# Altium PCB cPCIs_adapter.pcbdoc
Units mm, origin at the board's own origin, x right, y up, seen from the top; angles counter-clockwise.
Board outline 60.31 x 100 mm, 12 copper layers (Top Layer, L2GND, L3, L4PWR, L5, L6PWR, L7GND, L8, L9PWR, L10, L11GND, Bottom Layer), stack 1.695 mm thick; 16 components, 51 nets, 313 pads, 0 vias.
Unrouted connection lines stored in the file: 82.
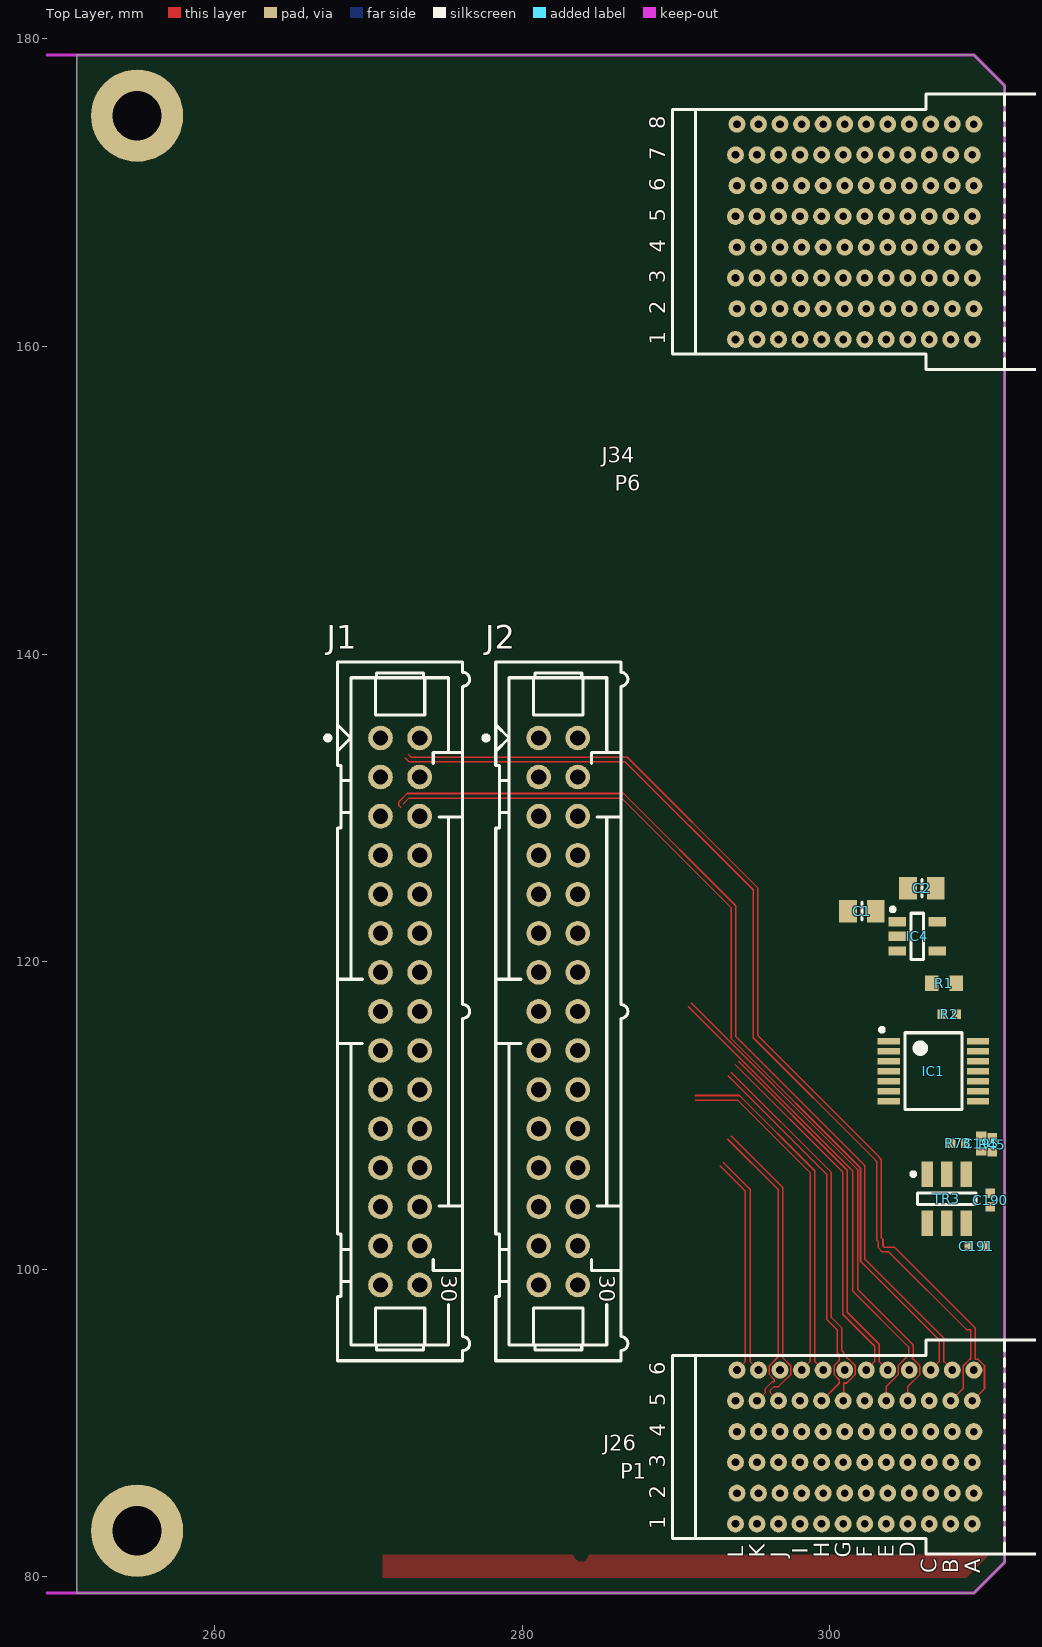
[diagram p0: Top Layer view]
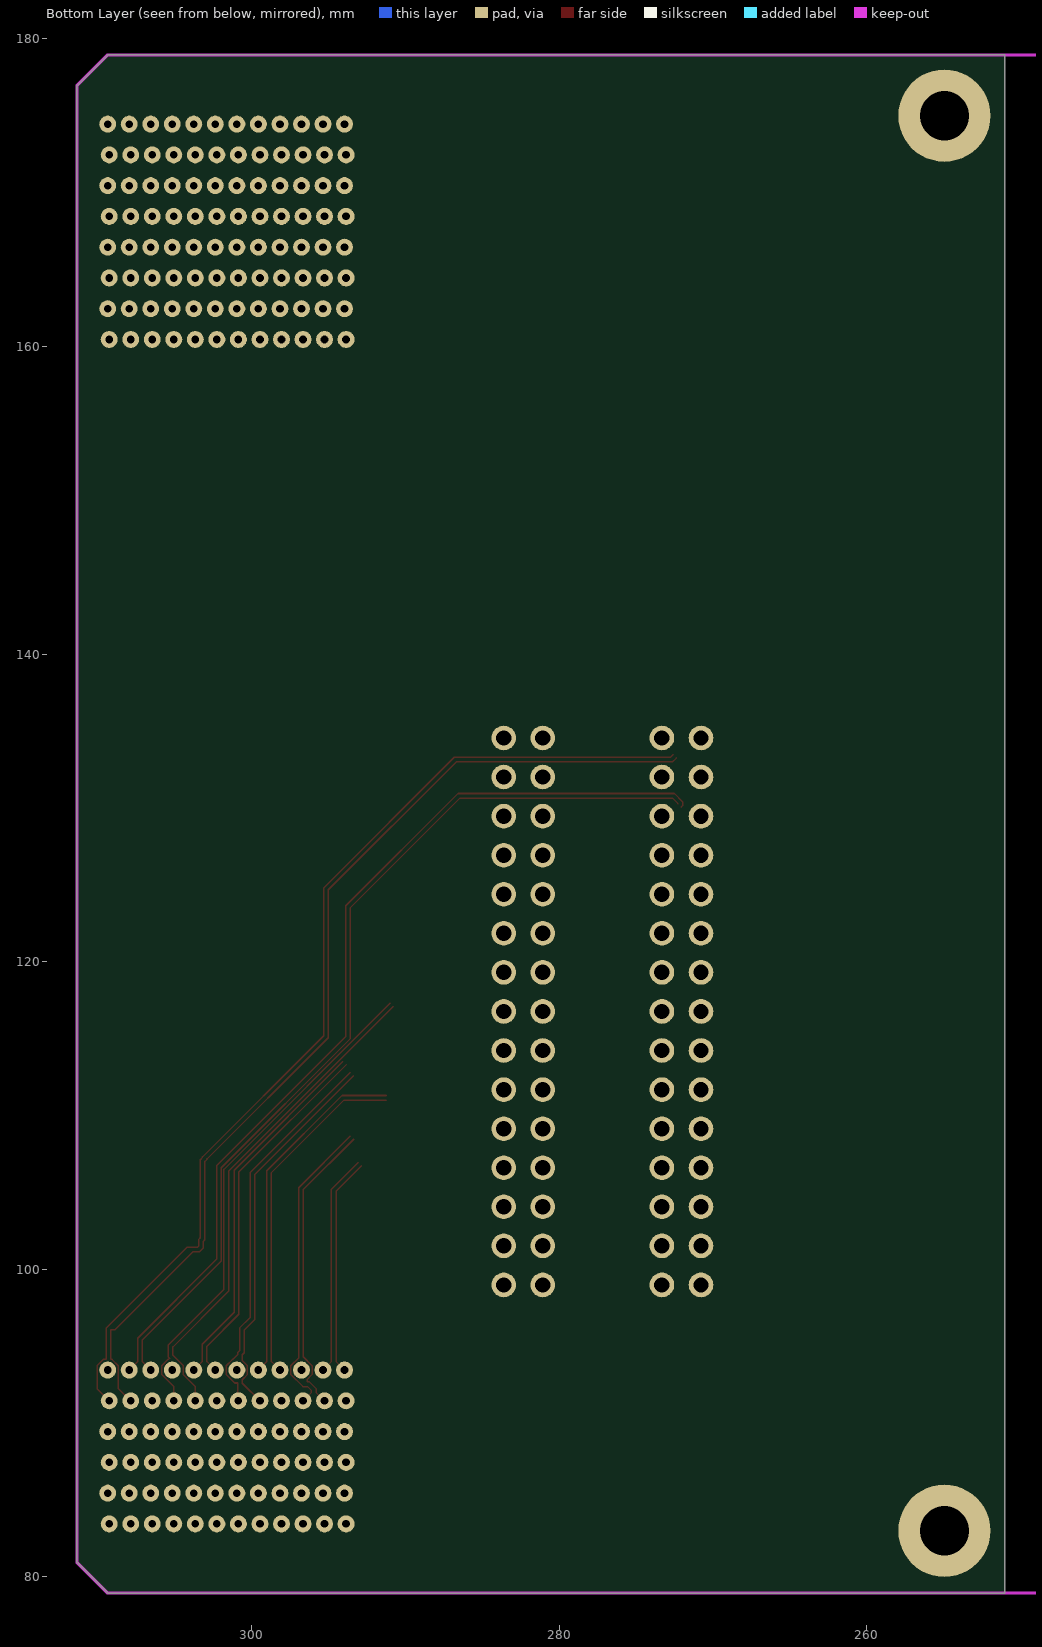
[diagram p1: Bottom Layer view, seen from below]
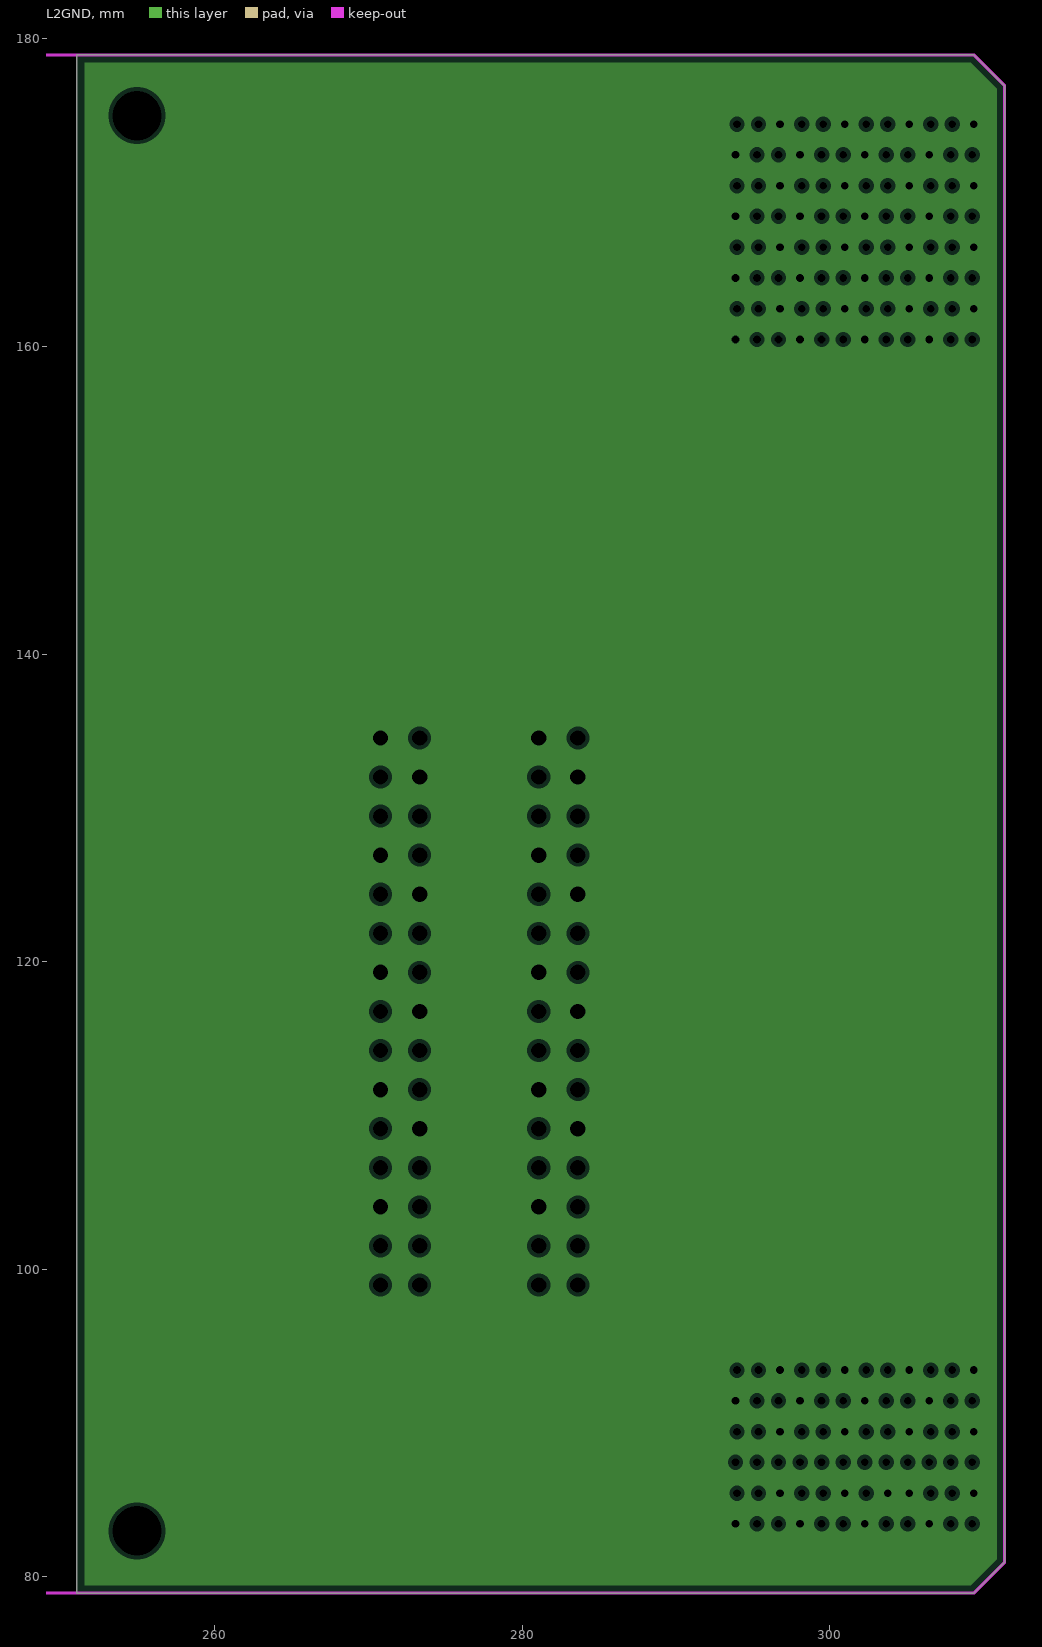
[diagram p2: L2GND, clearances drawn from the general rule]
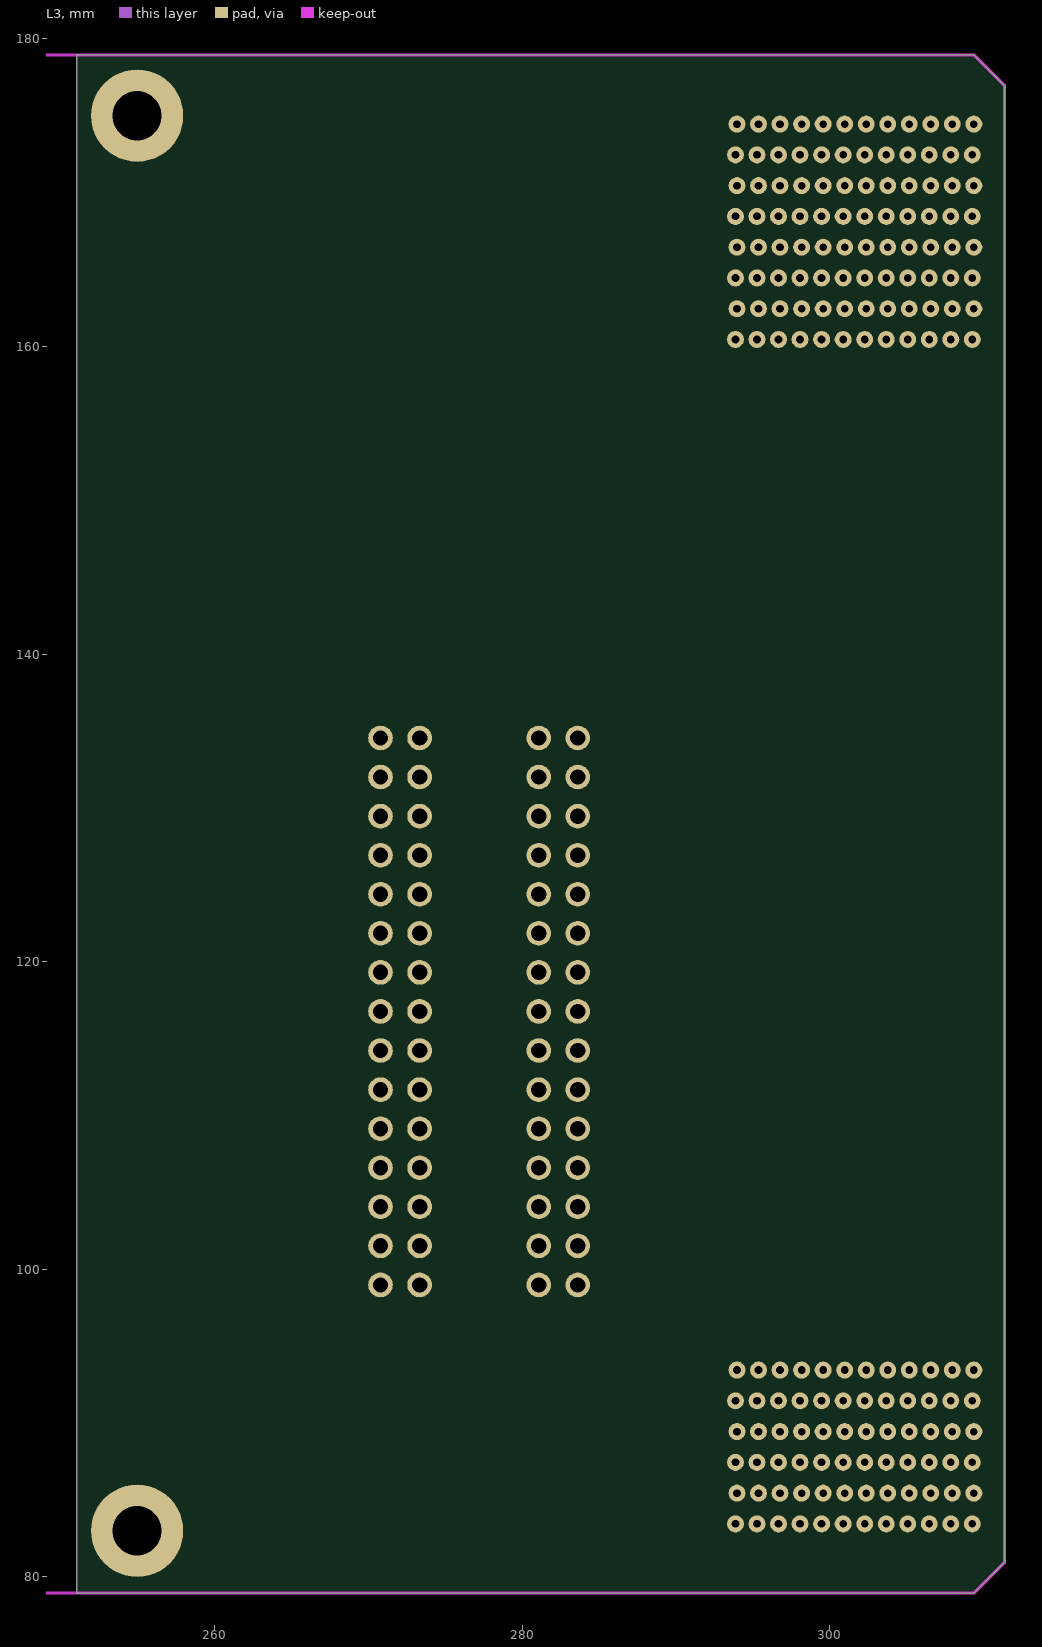
[diagram p3: L3]
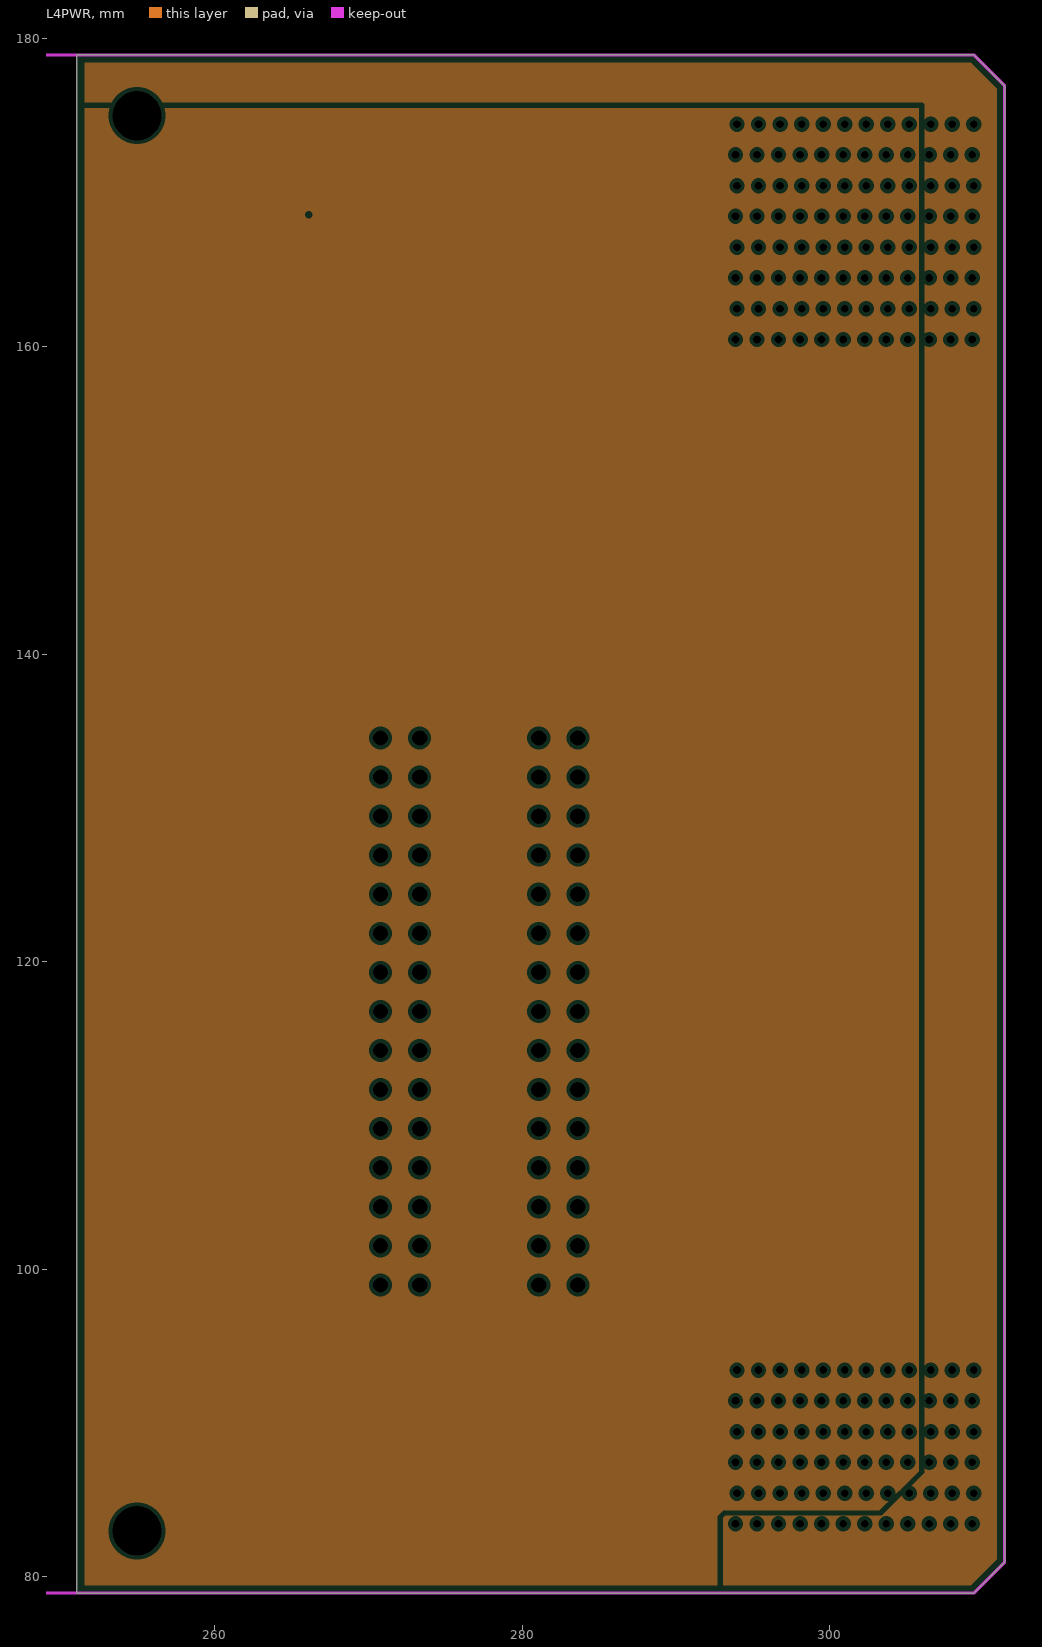
[diagram p4: L4PWR, clearances drawn from the general rule]
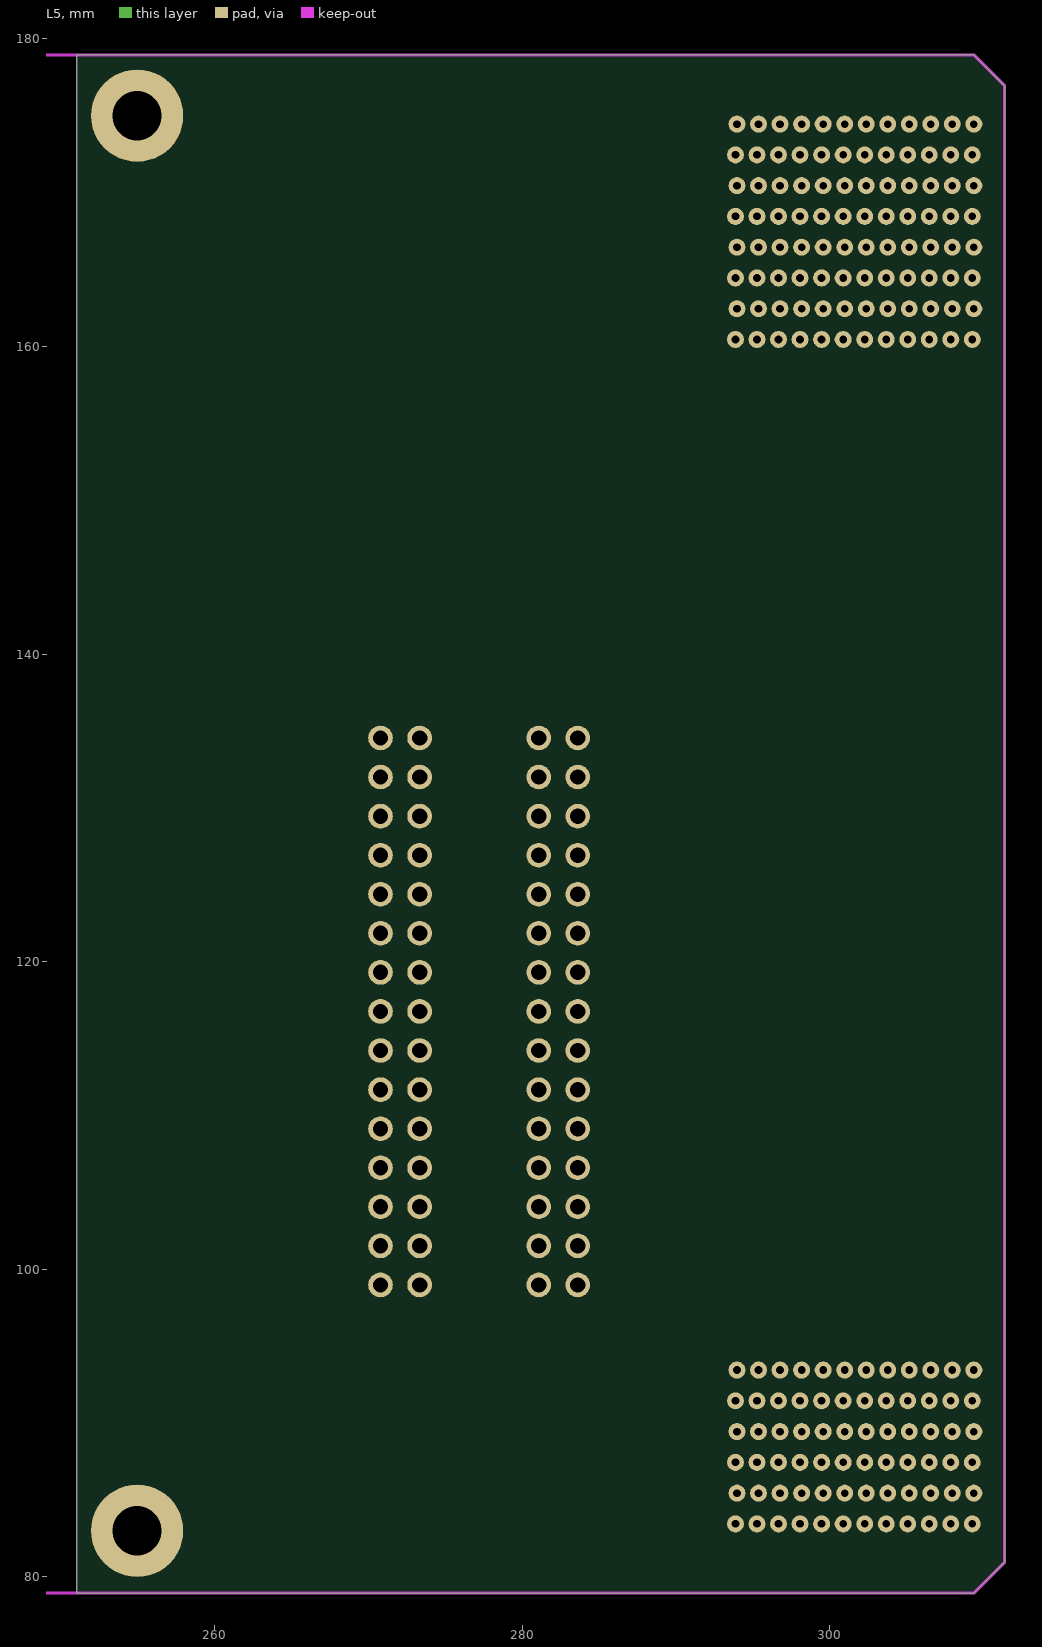
[diagram p5: L5]
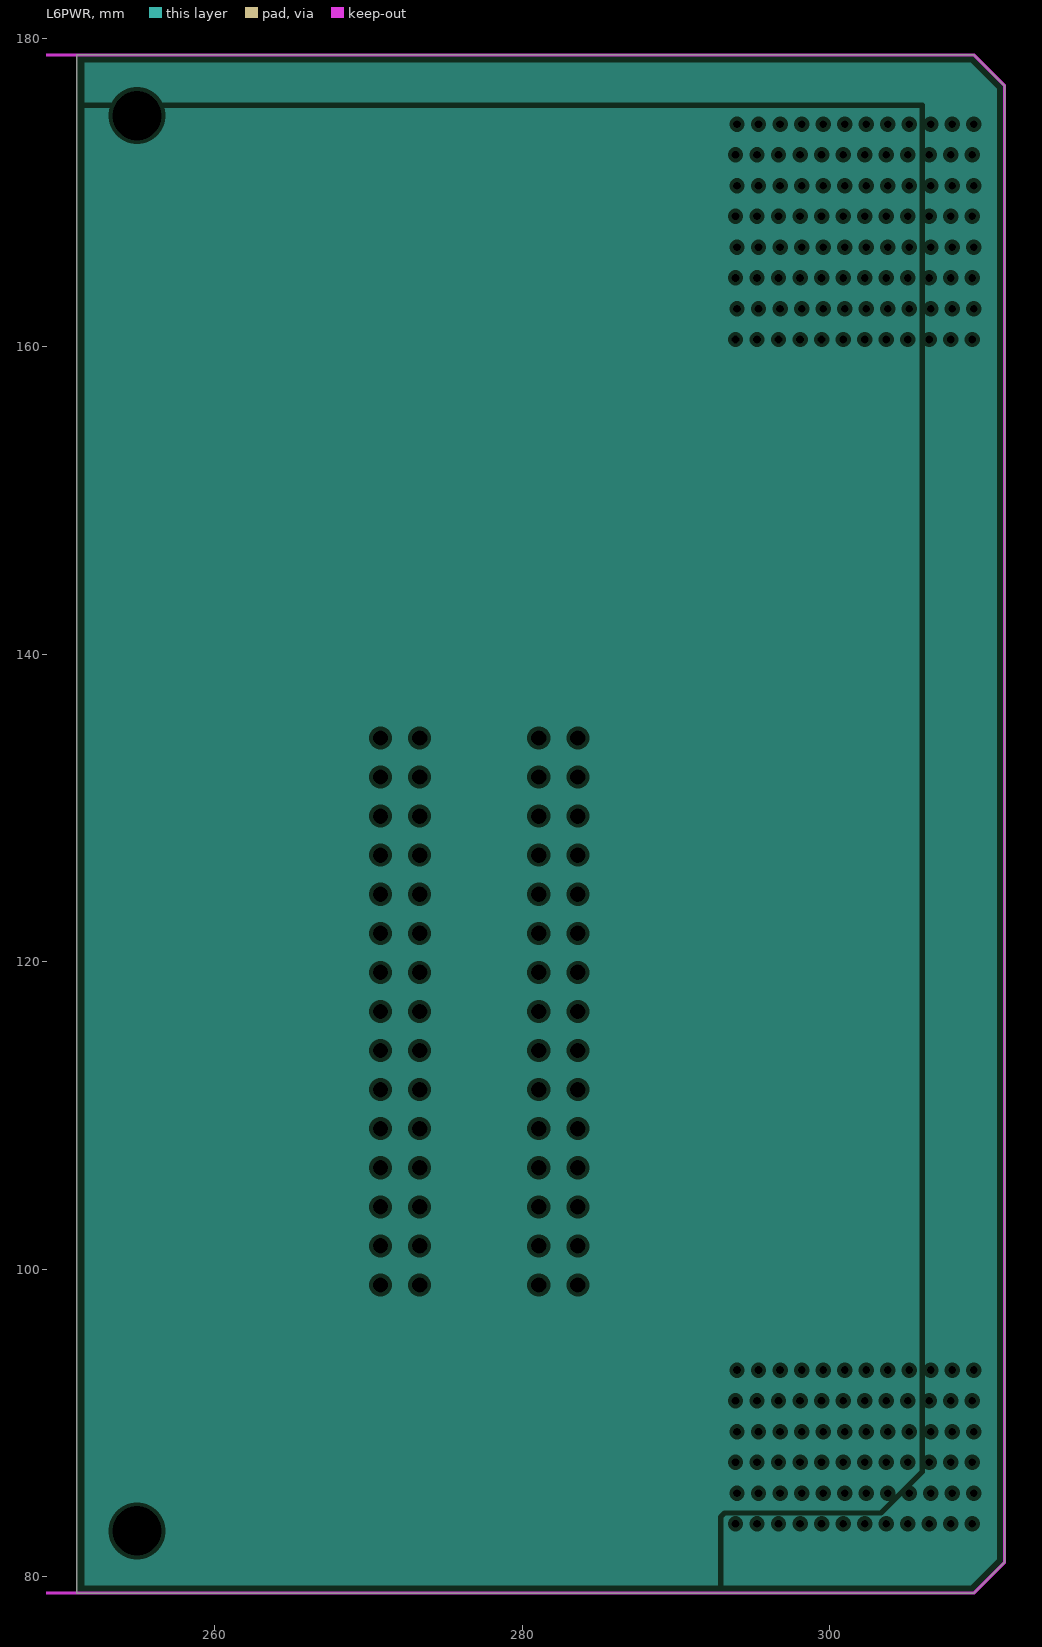
[diagram p6: L6PWR, clearances drawn from the general rule]
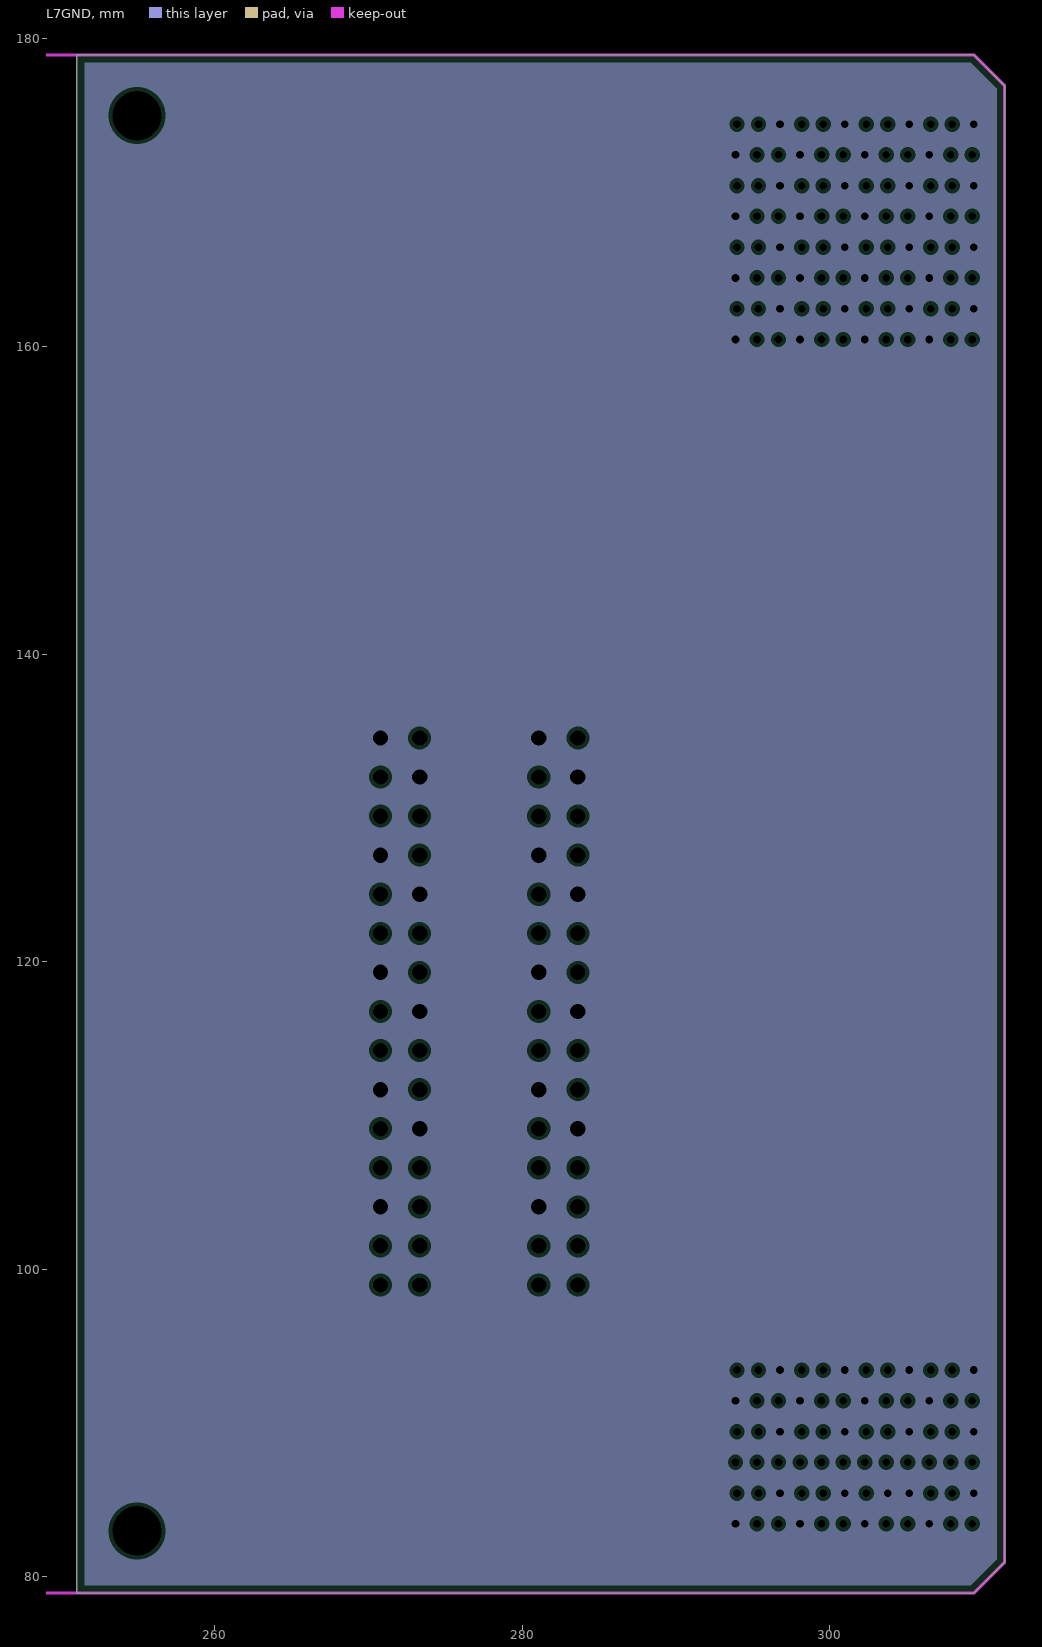
[diagram p7: L7GND, clearances drawn from the general rule]
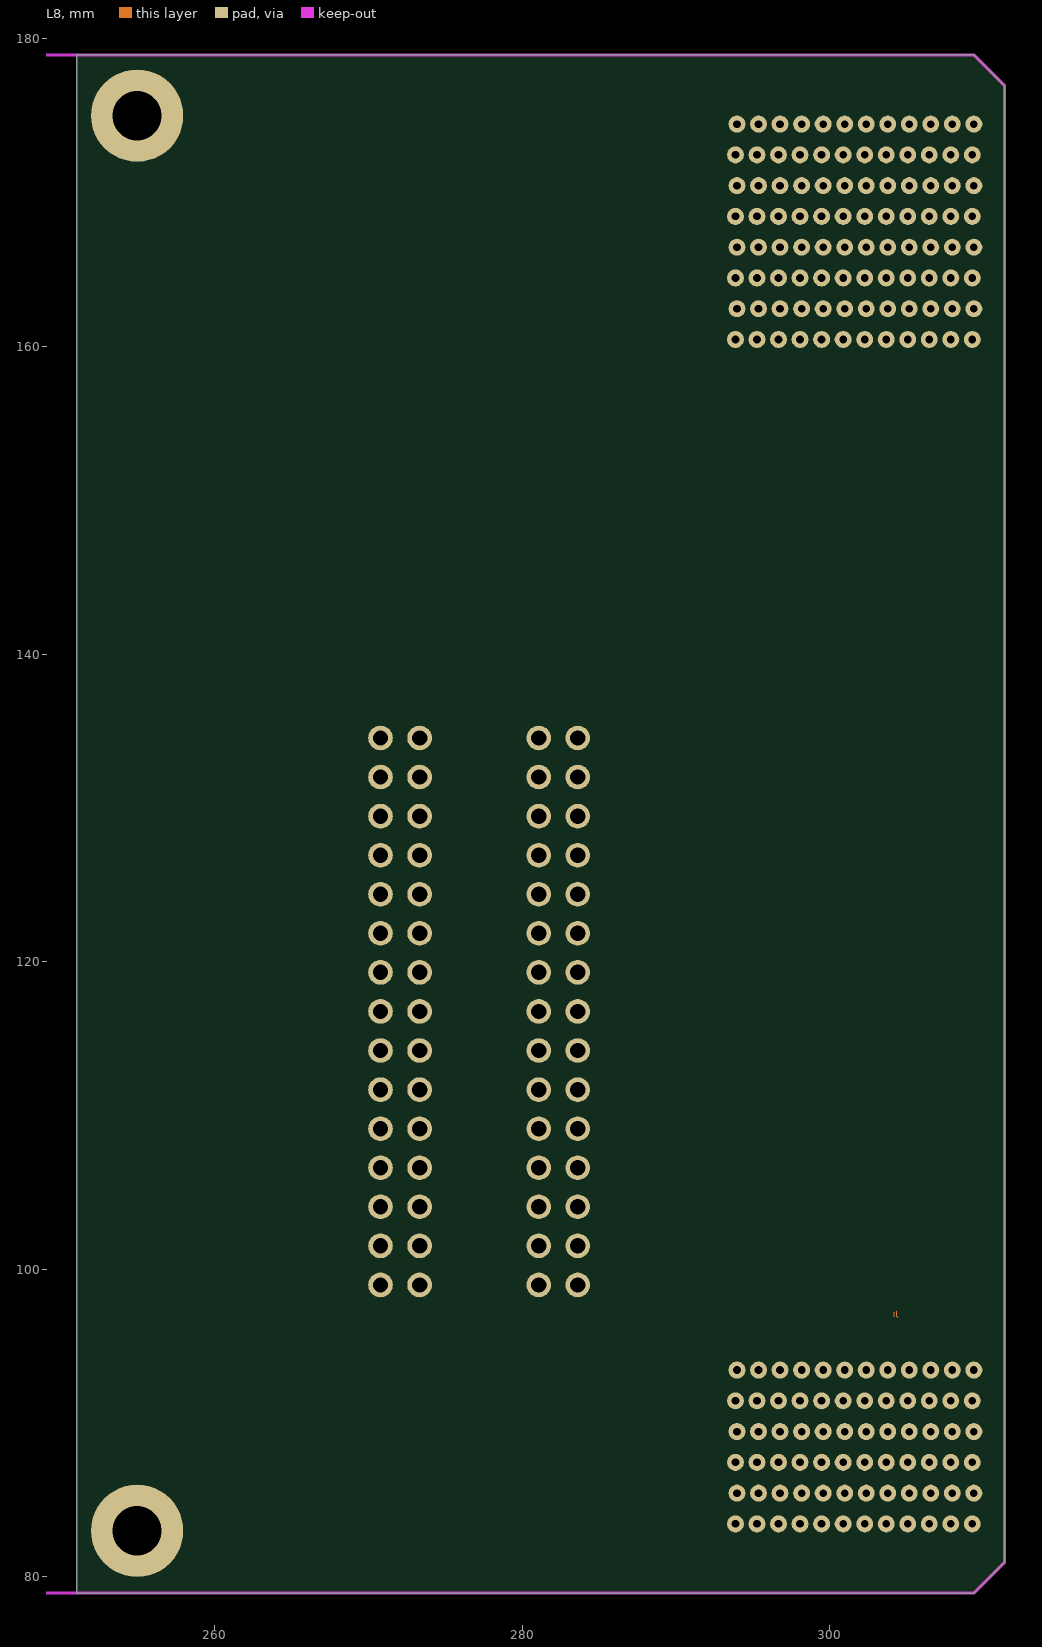
[diagram p8: L8]
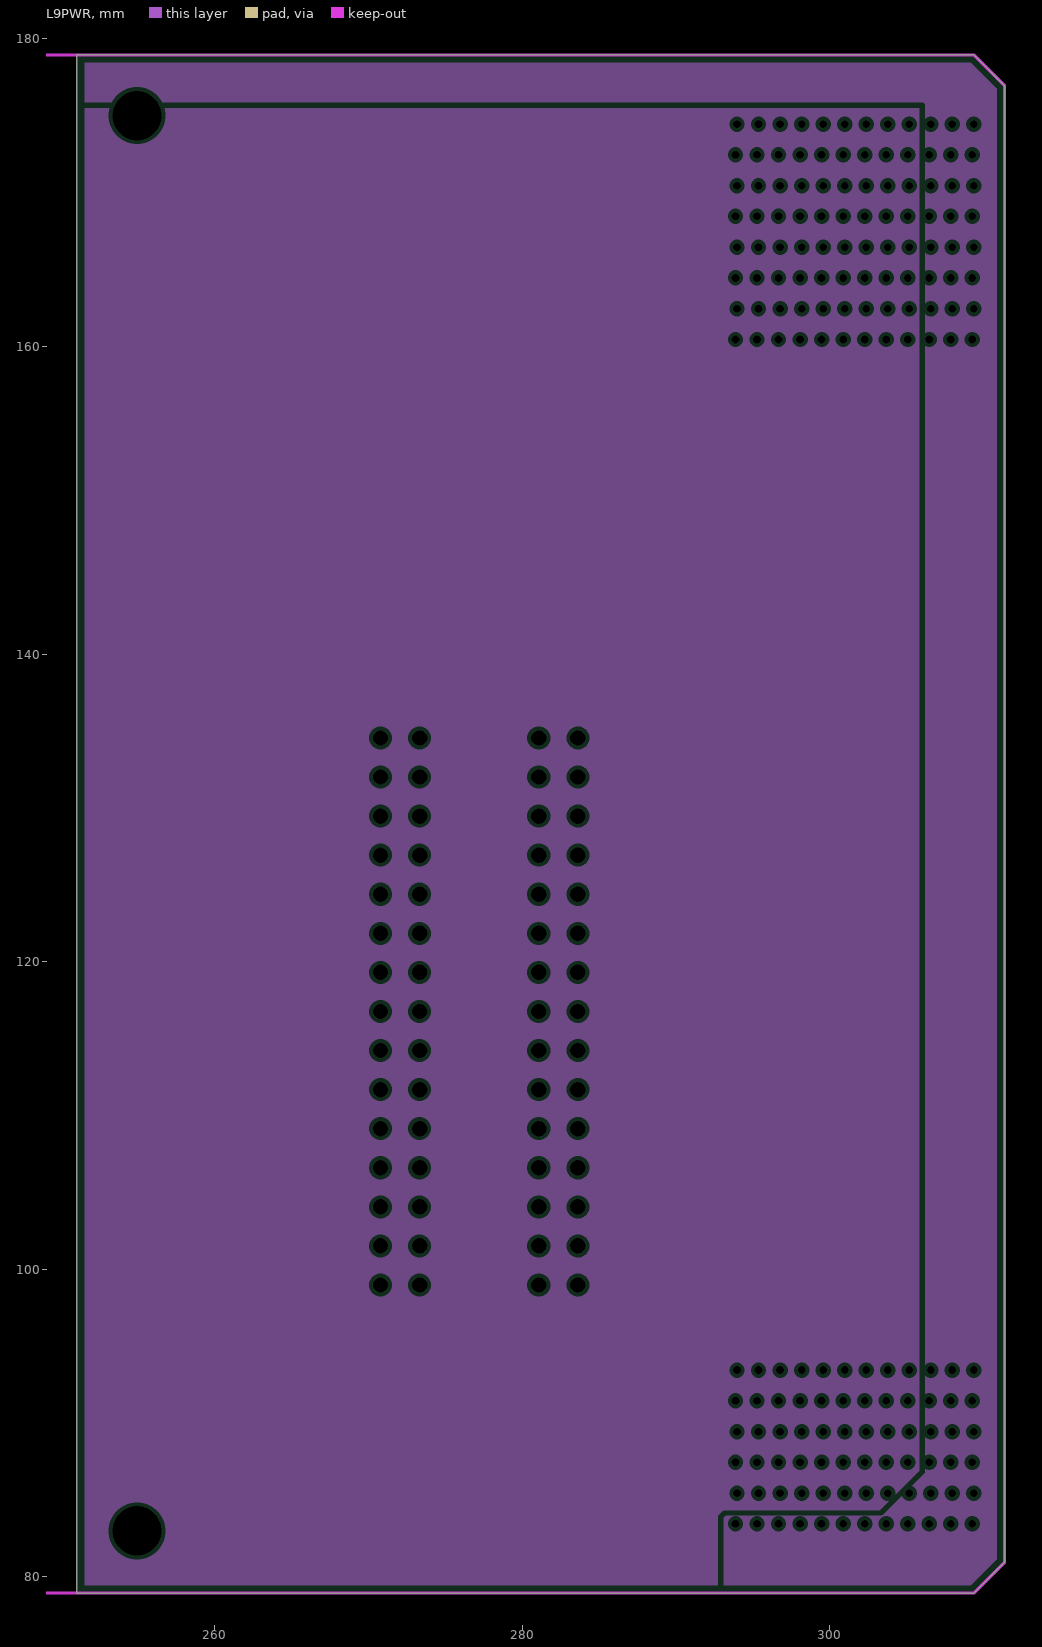
[diagram p9: L9PWR, clearances drawn from the general rule]
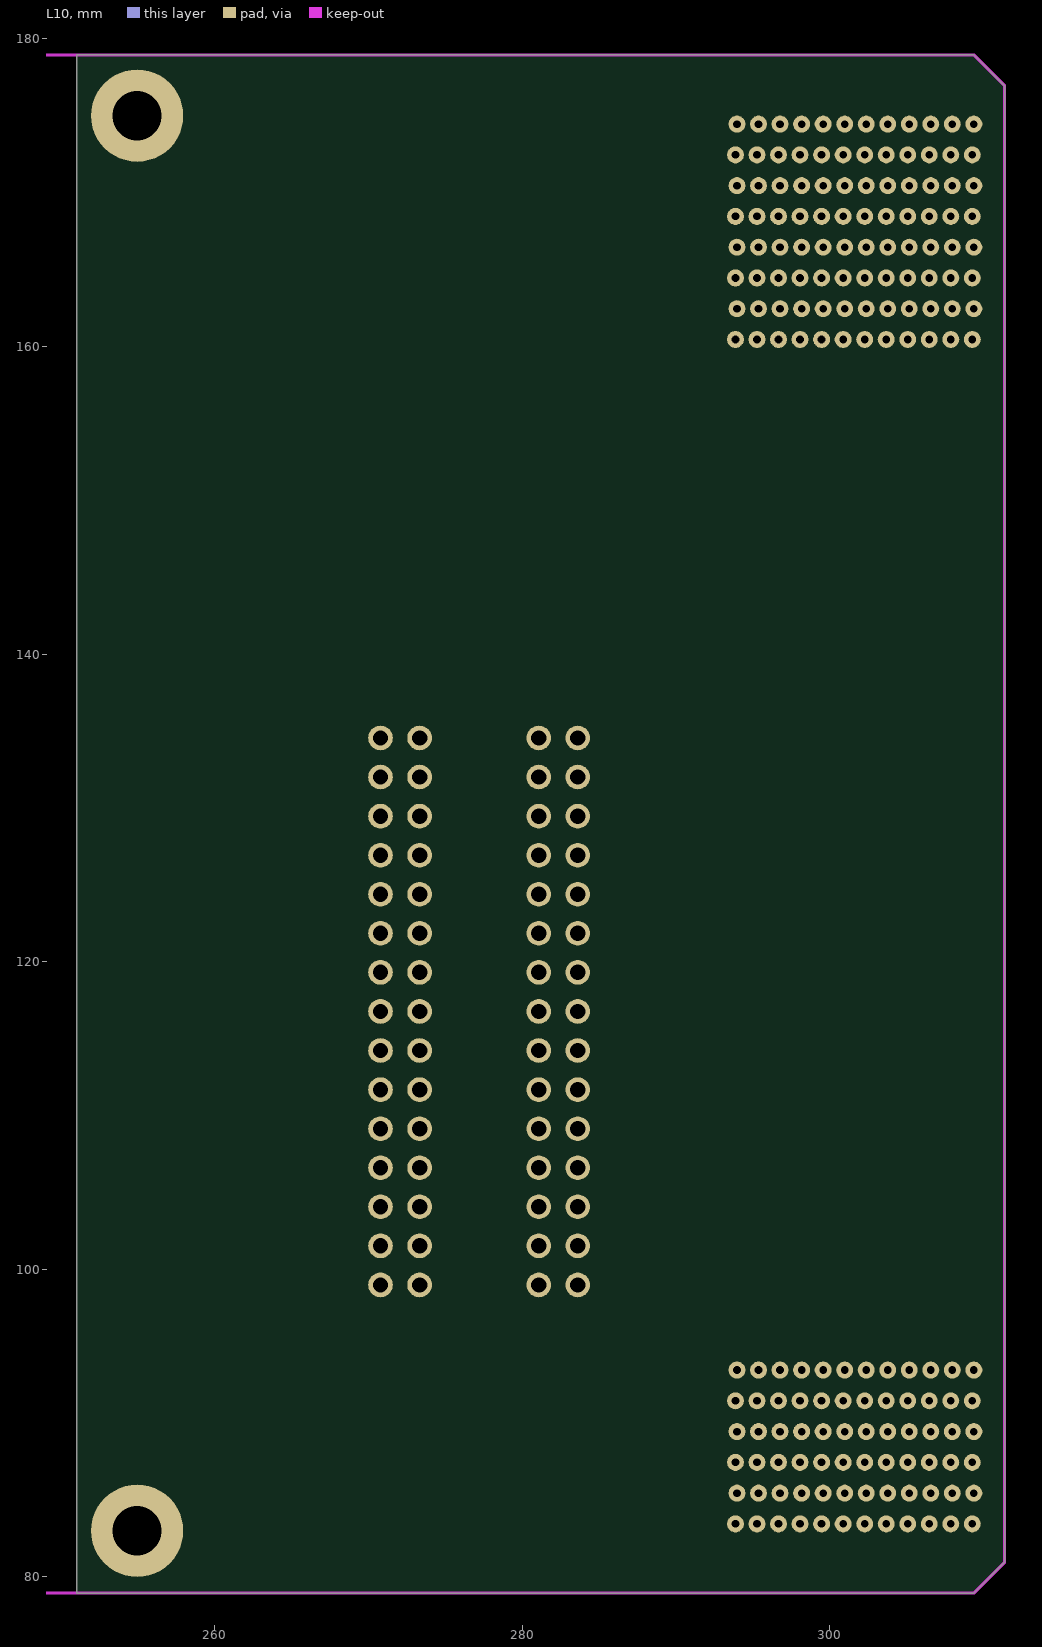
[diagram p10: L10]
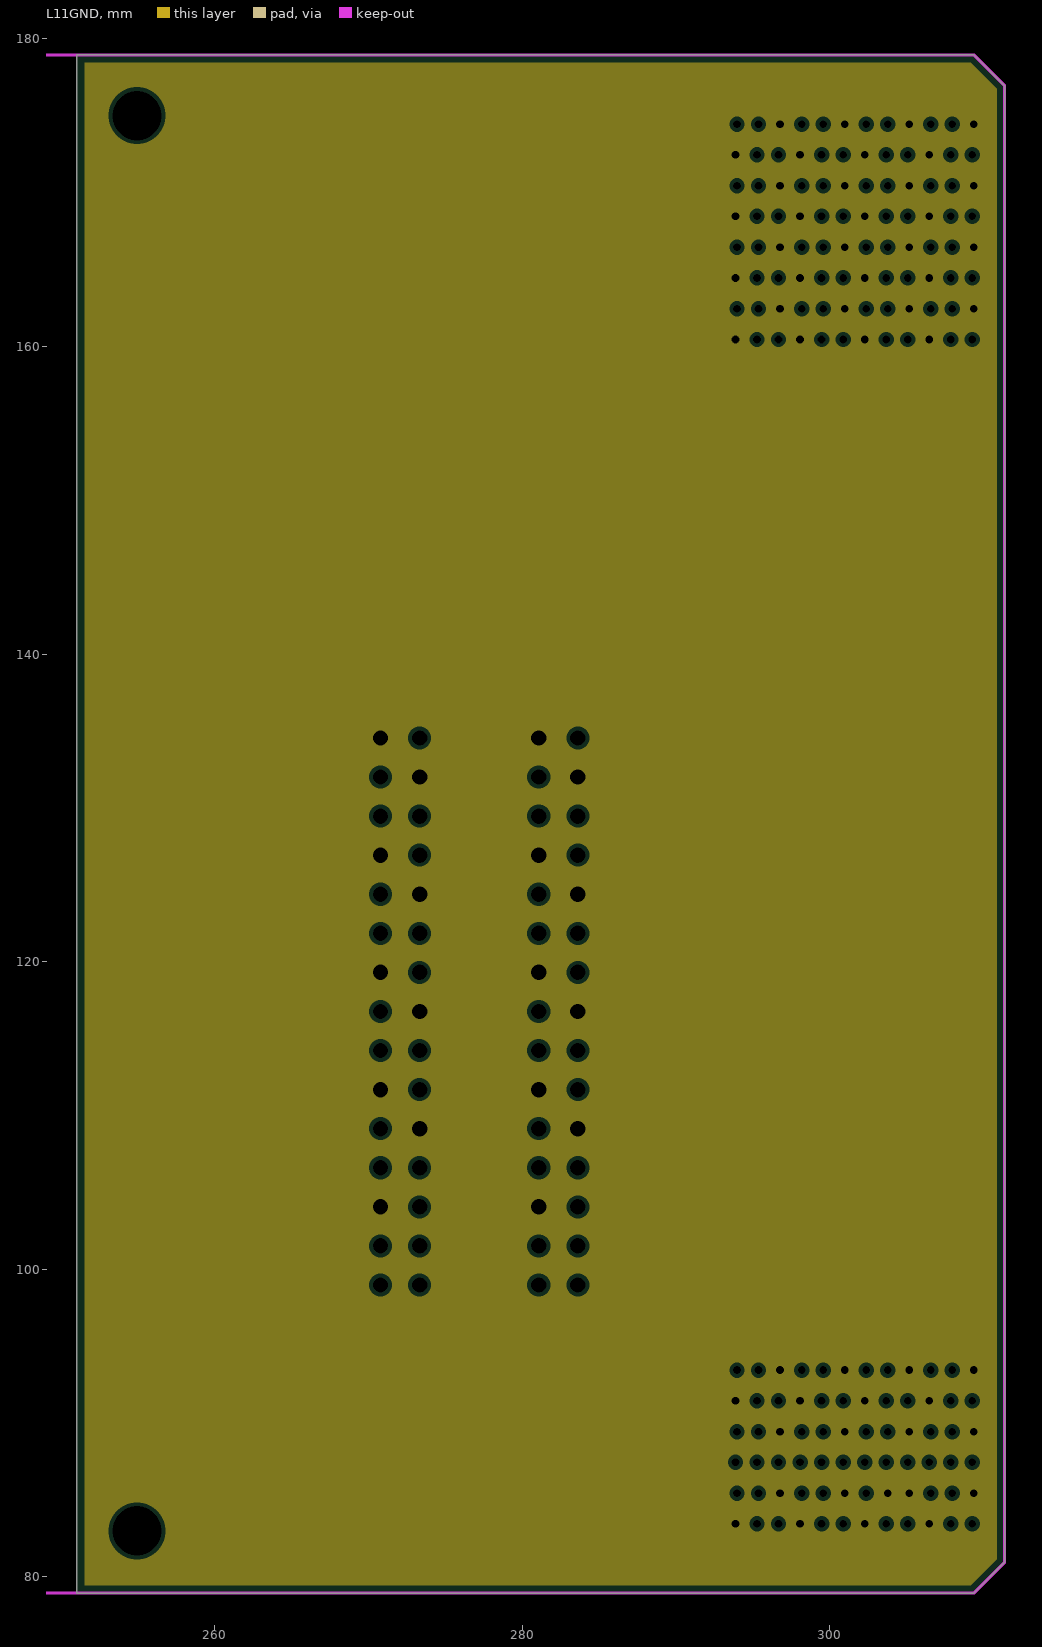
[diagram p11: L11GND, clearances drawn from the general rule]

## Layer stack, top to bottom
Top Solder: solder mask 0.01, Solder Resist, Dk 3.5
Top Layer: signal copper 0.035
Dielectric1: prepreg 0.075, FR-4, Dk 4.6
L2GND: plane copper 0.0175, net GND
Dielectric 2: core 0.15, FR-4, Dk 4.6
L3: signal copper 0.0175
Dielectric3: prepreg 0.15, FR-4, Dk 4.6
L4PWR: plane copper 0.0175
Dielectric 4: core 0.15, FR-4, Dk 4.6
L5: signal copper 0.0175
Dielectric 5: prepreg 0.15, FR-4, Dk 4.6
L6PWR: plane copper 0.0175
Dielectric 6: core 0.1, FR-4, Dk 4.6
L7GND: plane copper 0.0175, net GND
Dielectric 7: prepreg 0.15, FR-4, Dk 4.6
L8: signal copper 0.0175
Dielectric 8: core 0.15, FR-4, Dk 4.6
L9PWR: plane copper 0.0175
Dielectric 9: prepreg 0.15, FR-4, Dk 4.6
L10: signal copper 0.0175
Dielectric 10: core 0.15, FR-4, Dk 4.6
L11GND: plane copper 0.0175, net GND
Dielectric 11: prepreg 0.075, FR-4, Dk 4.6
Bottom Layer: signal copper 0.035
Bottom Solder: solder mask 0.01, Solder Resist, Dk 3.5

## Board outline
251.05,78.95 251.05,178.95 309.364,178.95 311.364,176.95 311.364,80.95 309.364,78.95

## Design rules (kind name [scope] priority, off if disabled: settings)
Clearance Clearance_NT [InComponent('NT*')] p1: gap=0 ignorepadtopadclearanceinfootprint=TRUE
Clearance Clearance_Poly [InPoly] p2: gap=0.18 ignorepadtopadclearanceinfootprint=FALSE
Clearance [All vs not HasFootprint('Net Tie')] p3: gap=0.09 ignorepadtopadclearanceinfootprint=FALSE except(0: Arc-Hole Track-Hole SMDPad-Hole THPad-Hole Via-Hole Fill-Hole Poly-Hole Region-Hole Text-Hole)
ComponentClearance ComponentClearance_pressfit [HasCompParameterValue('PressFit','Yes') vs InComponent('No Component')] p1: gap=5 collisioncheckmode=3 verticalgap=0.254 showdistances=FALSE
ComponentClearance ComponentClearance_NM [InComponentClass('NotMounted')] p2: gap=0 collisioncheckmode=3 verticalgap=0 showdistances=FALSE
ComponentClearance ComponentClearance_Top [not InComponentClass('Overlapping') and InComponentClass('Top Side Components') vs InComponentClass('Top Side Components')] p3: gap=0 collisioncheckmode=3 verticalgap=2540 showdistances=FALSE
ComponentClearance Overlapping [InComponentClass('Overlapping') vs InComponentClass('Overlapping')] p4: gap=0 collisioncheckmode=3 verticalgap=0 showdistances=FALSE
DiffPairsRouting [All] p1: maxlimit=0.2 minlimit=0.1 mostfreqgap=0.1 toplayer_mingap=0.2 toplayer_prefgap=0.2 toplayer_minwidth=0.1 toplayer_maxwidth=0.1 toplayer_prefwidth=0.1 midlayer1_maxgap=0.1 midlayer1_minwidth=0.08 midlayer1_maxwidth=0.08 midlayer1_prefwidth=0.08 midlayer2_maxgap=0.1 midlayer2_minwidth=0.08 midlayer2_maxwidth=0.08 midlayer2_prefwidth=0.08 midlayer3_maxgap=0.1 midlayer3_minwidth=0.08 midlayer3_maxwidth=0.08 midlayer3_prefwidth=0.08 midlayer4_maxgap=0.1 midlayer4_minwidth=0.08 midlayer4_maxwidth=0.08 midlayer4_prefwidth=0.08 bottomlayer_mingap=0.2 bottomlayer_prefgap=0.2 bottomlayer_minwidth=0.1 bottomlayer_maxwidth=0.1 bottomlayer_prefwidth=0.1 maxuncoupledlength=50
FabricationTestPointUsage TestPointUsage [All] p1: valid=0 allowmultiple=FALSE
FabricationTestpoint Testpoint [All] p1: side=3 testpointundercomponent=TRUE minsize=1.016 maxsize=2.54 preferedsize=1.524 minholesize=0 maxholesize=1.016 preferedholesize=0.813 testpointgrid=0.025 allowsidetop=TRUE allowsidebottom=TRUE usegrid=TRUE gridtolerance=0
Height [All] p1: minheight=0 maxheight=25 prefheight=10
HoleSize [All] p1: absolutevalues=TRUE maxlimit=5 minlimit=0.2 maxpercent=80.000 minpercent=20.000
HoleToHoleClearance [All] p1: gap=0.2 allowstackedmicrovias=TRUE
Length "Length CPCIs2a + XS" [InNetClass('CPCIs2a') or InxSignalClass('CPCIs2 XS')] p1: maxlimit=126 minlimit=121
Length "Length CPCIs5a + XS" [InNetClass('CPCIs5a')    or InxSignalClass('CPCIs5 XS')] p2: maxlimit=155.1 minlimit=151
MatchedLengths DiffPair_gbtclkm2c_MatchedLengths [InDifferentialPair ('FMCGBTCLKM2C_C1') Or InDifferentialPair ('FMCGBTCLKM2C_C0')] p1: tolerance=5 checknetsindiffpair=FALSE checkdiffpairvsdiffpair=TRUE checkxsignals=TRUE checkothers=TRUE
MatchedLengths DiffPair_gbtxClockDes_MatchedLengths [InDifferentialPair ('GBTXCLOCKDES_N0') Or InDifferentialPair ('GBTXCLOCKDES_P0') Or InDifferentialPair ('GBTXCLOCKDES_N1') Or InDifferentialPair ('GBTXCLOCKDES_P1')Or InDifferentialPair ('GBTXCLOCKDES_N2') Or InDifferentialPair ('GBTXCLOCKDES_P2')Or InDifferentialPair ('GBTXCLOCKDES_N3') Or InDifferentialPair ('GBTXCLOCKDES_P3') Or InDifferentialPair ('GBTXCLOCKDES_N4') Or InDifferentialPair ('GBTXCLOCKDES_P4')] p2: tolerance=5 checknetsindiffpair=FALSE checkdiffpairvsdiffpair=TRUE checkxsignals=TRUE checkothers=TRUE
MatchedLengths DiffPair_Scout_ScclkMatchedLengths [InDifferentialPair ('GBTXELINKSSCCLK') Or InDifferentialPair ('GBTXELINKSSCOUT')] p3: tolerance=5 checknetsindiffpair=FALSE checkdiffpairvsdiffpair=TRUE checkxsignals=TRUE checkothers=TRUE
MinimumAnnularRing MinimumAnnularRing_Via [IsVia] p1: minimumring=0.12
MinimumAnnularRing [All] p2: minimumring=0.198
MinimumSolderMaskSliver [IsThruPin vs IsThruPin] p1: minsoldermaskwidth=0
NetAntennae [All] p1 off: netantennaetolerance=0
PermittedLayers [All] p1: toplayerpermitted=TRUE bottomlayerpermitted=FALSE
PlaneClearance [All] p1: clearance=0.25
PlaneConnect PlaneConnect_ft_pcbm [InPadClass('ft_pcbm')] p1: planeconnectstyle=Relief reliefexpansion=0.25 reliefentries=4 reliefconductorwidth=0.2 reliefairgap=0.2
PlaneConnect PlaneConnect_Vias [IsVia or InPadClass('Direct')] p2: planeconnectstyle=Direct reliefexpansion=0.508 reliefentries=4 reliefconductorwidth=0.254 reliefairgap=0.254
PlaneConnect "PlaneConnect_0 > 0.5" [AsMM(HoleDiameter)<0.5] p3: planeconnectstyle=Relief reliefexpansion=0.3 reliefentries=4 reliefconductorwidth=0.2 reliefairgap=0.2
PlaneConnect "PlaneConnect_0.5 > 1" [(AsMM(HoleDiameter)>=0.5) and (AsMM(HoleDiameter)<1)] p4: planeconnectstyle=Relief reliefexpansion=0.3 reliefentries=4 reliefconductorwidth=0.25 reliefairgap=0.2
PlaneConnect "PlaneConnect_1 > 1.5" [(AsMM(HoleDiameter)>=1) and (AsMM(HoleDiameter)<1.5)] p5: planeconnectstyle=Relief reliefexpansion=0.3 reliefentries=4 reliefconductorwidth=0.3 reliefairgap=0.2
PlaneConnect "PlaneConnect_1.5 > 2" [(AsMM(HoleDiameter)>=1.5) and (AsMM(HoleDiameter)<2)] p6: planeconnectstyle=Relief reliefexpansion=0.3 reliefentries=4 reliefconductorwidth=0.4 reliefairgap=0.2
PlaneConnect [All] p7: planeconnectstyle=Relief reliefexpansion=0.3 reliefentries=4 reliefconductorwidth=0.5 reliefairgap=0.2
PolygonConnect PolygonConnect_Vias [IsVia or InPadClass('Direct') or InNetClass('ESD_STRIP')] p1: connectstyle=Direct reliefconductorwidth=0.254 reliefentries=4 polygonreliefangle="90 Angle" airgapwidth=0.254
PolygonConnect "PolygonConnect_0 > 0.5" [AsMM(HoleDiameter)<0.5] p2: connectstyle=Relief reliefconductorwidth=0.2 reliefentries=4 polygonreliefangle="90 Angle" airgapwidth=0.2
PolygonConnect "PolygonConnect_0.5 > 1" [(AsMM(HoleDiameter)>=0.5) and (AsMM(HoleDiameter)<1)] p3: connectstyle=Relief reliefconductorwidth=0.25 reliefentries=4 polygonreliefangle="90 Angle" airgapwidth=0.2
PolygonConnect "PolygonConnect_1 > 1.5" [(AsMM(HoleDiameter)>=1) and (AsMM(HoleDiameter)<1.5)] p4: connectstyle=Relief reliefconductorwidth=0.3 reliefentries=4 polygonreliefangle="90 Angle" airgapwidth=0.2
PolygonConnect "PolygonConnect_1.5 > 2" [(AsMM(HoleDiameter)>=1.5) and (AsMM(HoleDiameter)<2)] p5: connectstyle=Relief reliefconductorwidth=0.4 reliefentries=4 polygonreliefangle="90 Angle" airgapwidth=0.2
PolygonConnect [All] p6: connectstyle=Relief reliefconductorwidth=0.5 reliefentries=4 polygonreliefangle="90 Angle" airgapwidth=0.2
RoomDefinition Cpcis_connectors_P1_P6 [InComponentClass('Cpcis_connectors_P1_P6')] p1: confinementstyle=ConfineIn formatcopy=TRUE lockcomponents=FALSE outline 149.657,89.687 164.668,89.687 164.668,149.682 149.657,149.682
RoutingVias [All] p1: holewidth=0.3 width=0.65 viastyle="Through Hole" minholewidth=0.2 minwidth=0.45 maxholewidth=0.5 maxwidth=1
ShortCircuit ShortCircuit_NT [InComponent('J34') or  InComponent('J31') or InComponent('J30') or InComponent('J29') or InComponent('J33') or InComponent('J26') vs InComponent('NT*')] p1: allowed=TRUE
ShortCircuit [All] p2: allowed=FALSE
SilkToSilkClearance [All] p1: silktosilkclearance=0.05
SilkToSolderMaskClearance [IsPad] p1: minsilkscreentomaskgap=0.08 clearancetoexposedcopper=TRUE
SolderMaskExpansion [All] p1: expansion=0
ViasUnderSMD ViasUnderSMD_1 [HasFootprint ('CAPC0603X33N')   or HasFootprint ('RESC1005X40N')  or HasFootprint('CAPC1608X87N')   or HasFootprint('CAPC1005X55N')   or  HasFootprint('Net Tie')] p1: allowed=TRUE
ViasUnderSMD [not InComponentClass('Overlapping')] p2: allowed=FALSE
Width [All] p1: maxlimit=2.54 minlimit=0.08 preferedwidth=0.08 toplayer_minwidth=0.1 toplayer_prefwidth=0.1 bottomlayer_minwidth=0.1 bottomlayer_prefwidth=0.1 minimp=50.000000 maximp=50.000000 favimp=50.000000
16 further rules are at their usual default settings.

## Classes and differential pairs
differential pair LVDS15: +LVDS15_P -LVDS15_N
differential pair LVDS14: +LVDS14_P -LVDS14_N
differential pair LVDS13: +LVDS13_P -LVDS13_N
differential pair LVDS12: +LVDS12_P -LVDS12_N
differential pair LVDS11: +LVDS11_P -LVDS11_N
differential pair LVDS10: +LVDS10_P -LVDS10_N
differential pair LVDS9: +LVDS9_P -LVDS9_N
differential pair LVDS8: +LVDS8_P -LVDS8_N
differential pair LVDS7: +LVDS7_P -LVDS7_N
differential pair LVDS6: +LVDS6_P -LVDS6_N
differential pair LVDS5: +LVDS5_P -LVDS5_N
differential pair LVDS4: +LVDS4_P -LVDS4_N
differential pair LVDS3: +LVDS3_P -LVDS3_N
differential pair LVDS2: +LVDS2_P -LVDS2_N
differential pair LVDS1: +LVDS1_P -LVDS1_N
differential pair LVDS0: +LVDS0_P -LVDS0_N

## Components (designator, comment, footprint, x,y, rotation, side; value= is the part's Value field where it differs from the comment)
C1 "1uF" CAPC2012X140N 302.084,123.288 r0 top
C2 "1uF" CAPC2012X140N 305.984,124.77 r0 top
C190 "100nF" CAPC1005X55N 310.42,104.505 r90 top
C191 "0.5pF" CAPC1005X50N 309.524,101.516 r180 top
C195 "0.5pF" CAPC1005X50N 309.845,108.168 r90 top
IC1 "74HC4066PW" SOP65P640X110-14N 306.73,112.878 r0 top
IC4 "NCP703SN33T1G" SOT95P275X110-5N 305.689,121.649 r0 top
J1 "=Familly" 3M_N2530-6002RB 272.059,116.764 r270 top
J2 "=Familly" 3M_N2530-6002RB 282.346,116.764 r270 top
J26 "P1" AMPHENOL_10052825-101LF 301.614,88.45 r90 top
J34 "P6" AMPHENOL_10052838-101LF 301.614,167.45 r90 top
R1 "220" RESC1608X55N 307.42,118.59 r0 top
R2 "0" RESC1005X40N 307.774,116.59 r0 top
R45 "0" RESC1005X40N 310.566,108.09 r90 top
R73 "0" RESC1005X40N 308.356,108.208 r180 top
TR3 "1:2" XFMR_MINI-CIRCUITS_DB1627 307.594,104.59 r0 top

## Footprints (in the part's own frame and the unit in brackets; to place one, negate y for a bottom-side part, rotate by r counter-clockwise, add the part's x,y. Pads: shape width x height; smd on the part's side, far side on the other; paste and mask are expansions set on the pad)
3M_N2530-6002RB [mm] "30 Contacts - Straight .100\" x .100\" Low Profile Four-Wall Header"
  round 1.6 hole 1: 1(-17.78,-1.27) 2(-17.78,1.27) 3(-15.24,-1.27) 4(-15.24,1.27) 5(-12.7,-1.27) 6(-12.7,1.27) 7(-10.16,-1.27) 8(-10.16,1.27) 9(-7.62,-1.27) 10(-7.62,1.27) 11(-5.08,-1.27) 12(-5.08,1.27) 13(-2.54,-1.27) 14(-2.54,1.27) 15(0,-1.27) 16(0,1.27) 17(2.54,-1.27) 18(2.54,1.27) 19(5.08,-1.27) 20(5.08,1.27) 21(7.62,-1.27) 22(7.62,1.27) 23(10.16,-1.27) 24(10.16,1.27) 25(12.7,-1.27) 26(12.7,1.27) 27(15.24,-1.27) 28(15.24,1.27) 29(17.78,-1.27) 30(17.78,1.27)
  silkscreen extent -22.71,-4.85 22.71,4.52, body extent -22.71,-4.11 22.71,4.52, height 9.91
AMPHENOL_10052825-101LF [mm] "72 Contacts, 2mm Pitch, 6 Columns, 4 Pairs per Column, 4 Walls, Right Angle Header"
  round 1.1 hole 0.5: A1(-5,-7.65) A2(-3,-7.75) A3(-1,-7.65) A4(1,-7.75) A5(3,-7.65) A6(5,-7.75) B1(-5,-6.25) B2(-3,-6.35) B3(-1,-6.25) B4(1,-6.35) B5(3,-6.25) B6(5,-6.35) C1(-5,-4.85) C2(-3,-4.95) C3(-1,-4.85) C4(1,-4.95) C5(3,-4.85) C6(5,-4.95) D1(-5,-3.45) D2(-3,-3.55) D3(-1,-3.45) D4(1,-3.55) D5(3,-3.45) D6(5,-3.55) E1(-5,-2.05) E2(-3,-2.15) E3(-1,-2.05) E4(1,-2.15) E5(3,-2.05) E6(5,-2.15) F1(-5,-0.65) F2(-3,-0.75) F3(-1,-0.65) F4(1,-0.75) F5(3,-0.65) F6(5,-0.75) G1(-5,0.75) G2(-3,0.65) G3(-1,0.75) G4(1,0.65) G5(3,0.75) G6(5,0.65) H1(-5,2.15) H2(-3,2.05) H3(-1,2.15) H4(1,2.05) H5(3,2.15) H6(5,2.05) I1(-5,3.55) I2(-3,3.45) I3(-1,3.55) I4(1,3.45) I5(3,3.55) I6(5,3.45) J1(-5,4.95) J2(-3,4.85) J3(-1,4.95) J4(1,4.85) J5(3,4.95) J6(5,4.85) K1(-5,6.35) K2(-3,6.25) K3(-1,6.35) K4(1,6.25) K5(3,6.35) K6(5,6.25) L1(-5,7.75) L2(-3,7.65) L3(-1,7.75) L4(1,7.65) L5(3,7.75) L6(5,7.65)
  silkscreen extent -6.95,-21.95 6.95,11.85, body extent -6.95,-21.95 6.95,11.85, height 15.25
AMPHENOL_10052838-101LF [mm] "96 Contacts, 2mm Pitch, 8 Columns, 4 Pairs per Column, 4 Walls, Right Angle Header"
  round 1.1 hole 0.5: A1(-7,-7.65) A2(-5,-7.75) A3(-3,-7.65) A4(-1,-7.75) A5(1,-7.65) A6(3,-7.75) A7(5,-7.65) A8(7,-7.75) B1(-7,-6.25) B2(-5,-6.35) B3(-3,-6.25) B4(-1,-6.35) B5(1,-6.25) B6(3,-6.35) B7(5,-6.25) B8(7,-6.35) C1(-7,-4.85) C2(-5,-4.95) C3(-3,-4.85) C4(-1,-4.95) C5(1,-4.85) C6(3,-4.95) C7(5,-4.85) C8(7,-4.95) D1(-7,-3.45) D2(-5,-3.55) D3(-3,-3.45) D4(-1,-3.55) D5(1,-3.45) D6(3,-3.55) D7(5,-3.45) D8(7,-3.55) E1(-7,-2.05) E2(-5,-2.15) E3(-3,-2.05) E4(-1,-2.15) E5(1,-2.05) E6(3,-2.15) E7(5,-2.05) E8(7,-2.15) F1(-7,-0.65) F2(-5,-0.75) F3(-3,-0.65) F4(-1,-0.75) F5(1,-0.65) F6(3,-0.75) F7(5,-0.65) F8(7,-0.75) G1(-7,0.75) G2(-5,0.65) G3(-3,0.75) G4(-1,0.65) G5(1,0.75) G6(3,0.65) G7(5,0.75) G8(7,0.65) H1(-7,2.15) H2(-5,2.05) H3(-3,2.15) H4(-1,2.05) H5(1,2.15) H6(3,2.05) H7(5,2.15) H8(7,2.05) I1(-7,3.55) I2(-5,3.45) I3(-3,3.55) I4(-1,3.45) I5(1,3.55) I6(3,3.45) I7(5,3.55) I8(7,3.45) J1(-7,4.95) J2(-5,4.85) J3(-3,4.95) J4(-1,4.85) J5(1,4.95) J6(3,4.85) J7(5,4.95) J8(7,4.85) K1(-7,6.35) K2(-5,6.25) K3(-3,6.35) K4(-1,6.25) K5(1,6.35) K6(3,6.25) K7(5,6.35) K8(7,6.25) L1(-7,7.75) L2(-5,7.65) L3(-3,7.75) L4(-1,7.65) L5(1,7.75) L6(3,7.65) L7(5,7.75) L8(7,7.65)
  silkscreen extent -8.95,-21.95 8.95,11.85, body extent -8.95,-21.95 8.95,11.85, height 15.25
CAPC1005X50N [mm] "Chip Capacitor, Body 1.0x0.55mm, IPC Medium Density"
  rect 0.57x0.68 smd: 1(-0.49,0) 2(0.49,0)
  body extent -0.5,-0.27 0.5,0.28, height 0.5
CAPC1005X55N [mm] "Capacitor, Non-Polarized, Chip; 1.00mm L X 0.50mm W X 0.70mm H, IPC Medium Density"
  rect 0.62x0.62 smd: 1(-0.45,0) 2(0.45,0)
  body extent -0.52,-0.27 0.53,0.28, height 0.55
CAPC2012X140N [mm] "Chip Capacitor, Body 2.0x1.25mm, IPC Medium Density"
  rect 1.15x1.45 smd: 1(-0.9,0) 2(0.9,0)
  silkscreen extent 0,-0.58 0,0.58, body extent -1.05,-0.67 1.05,0.68, height 1.3
RESC1005X40N [mm] "Chip Resistor, EIA 0402, Metric 1005, Body 1.0x0.5mm, IPC Medium Density"
  rect 0.58x0.62 smd: 1(-0.47,0) 2(0.47,0)
  body extent -0.52,-0.27 0.53,0.28, height 0.4
RESC1608X55N [mm] "Chip Resistor, EIA 0603, Metric 1608, Body 1.6x0.8mm, IPC Medium Density"
  rect 0.9x1 smd: 1(-0.8,0) 2(0.8,0)
  body extent -0.87,-0.47 0.88,0.48, height 0.55
SOP65P640X110-14N [mm] "SOP, 14-Leads, Body 4.4x5mm (max), Pitch 0.65mm, IPC Medium Density"
  rect 1.45x0.45 smd: 1(-2.9,1.95) 2(-2.9,1.3) 3(-2.9,0.65) 4(-2.9,0) 5(-2.9,-0.65) 6(-2.9,-1.3) 7(-2.9,-1.95) 8(2.9,-1.95) 9(2.9,-1.3) 10(2.9,-0.65) 11(2.9,0) 12(2.9,0.65) 13(2.9,1.3) 14(2.9,1.95)
  silkscreen extent -3.47,-2.5 1.85,2.82, body extent -3.12,-2.55 3.12,2.55, height 1.1
SOT95P275X110-5N [mm] "SOT, 0.95mm Pitch; 5 Pin, 1.50mm W X 3.00mm L X 1.10mm H Body, IPC Medium Density"
  rect 1.15x0.6 smd: 1(-1.3,0.95) 2(-1.3,0) 3(-1.3,-0.95) 4(1.3,-0.95) 5(1.3,0.95)
  silkscreen extent -1.72,-1.5 0.4,1.87, body extent -1.37,-1.5 1.38,1.5, height 1.1
XFMR_MINI-CIRCUITS_DB1627 [mm] "MINI-CIRCUITS RF Transformer, Case DB1627 - Body 4.06X3.81mm"
  rect 0.76x1.65 smd: 1(-1.27,1.59) 2(0,1.59) 3(1.27,1.59) 4(1.27,-1.59) 5(0,-1.59) 6(-1.27,-1.59)
  silkscreen extent -2.3,-0.37 1.91,1.72, body extent -1.9,-2.03 1.91,2.03, height 4.06

## Part data
C1 C2: library part CC0805_1UF_35V_20%_X7R, "Non-polarised capacitor", Case=0805, Manufacturer=GENERIC, Manufacturer1 ComponentHeight=1.35mm, Manufacturer1 Example="TAIYO YUDEN", Manufacturer1 Part Number=GMK212B7105MG-T, Tolerance=±20%, Voltage=35V, Author="CERN DEM JLC", Component Type=Standard, CreateDate=22.06.2011, HelpURL=\\cern.ch\dfs\Applications\Altium\Datasheets\CC0805_X7R_TAIYO-YUDEN_HIGH-VALUE.pdf, LatestRevisionDate=22.06.2011, Manufacturer Part Number=CC0805_1UF_35V_20%_X7R, Mounted=Yes, Part Description="SMD Multilayer Chip Ceramic Capacitor", Part Number=CC0805_1UF_35V_20%_X7R, Pin Count=2, Sense=No, SMD=Yes, Socket=No, Status="Not Recommended", TC=X7R
C190: library part CC0402_100NF_16V_10%_X5R, "Non-polarised capacitor", Case=0402, Manufacturer=GENERIC, Manufacturer1 ComponentHeight=0.55mm, Manufacturer1 Example=MURATA, Manufacturer1 Part Number=GRM155R61C104KA88D, Tolerance=±10%, Voltage=16V, Author="CERN DEM JLC", Component Type=Standard, CreateDate=10.12.2013, HelpURL=\\cern.ch\dfs\Applications\Altium\Datasheets\CC0402_X5R_MURATA_GRM.pdf, LatestRevisionDate=10.12.2013, Manufacturer Part Number=CC0402_100NF_16V_10%_X5R, Mounted=Yes, Part Description="SMD Multilayer Chip Ceramic Capacitor", Part Number=CC0402_100NF_16V_10%_X5R, Pin Count=2, Sense=No, SMD=Yes, Socket=No, Status=None, TC=X5R
C191 C195: library part CC0402_0.5PF_25V_0.05PF_AVX_04023J0R5ABSTR, "Non-polarised capacitor", Case=0402, Manufacturer=AVX, Manufacturer Part Number=04023J0R5ABSTR, Tolerance=±0.05pF, Voltage=25V, Author="CERN DEM JLC", ComponentHeight=0.5mm, Component Type=Standard, CreateDate=2017-02-22, HelpURL=\\cern.ch\dfs\Applications\Altium\Datasheets\CC0402_AVX_ACCU-P.pdf, LatestRevisionDate=2017-02-22, Mounted=Yes, Part Description="Thin-Film Chip Capacitors for RF Signal and Power Applications, Accu-P Series", Part Number=CC0402_0.5PF_25V_0.05PF_AVX_04023J0R5ABSTR, Pin Count=2, Sense=No, SMD=Yes, Socket=No, Status=None
IC1: Case=TSSOP14, Manufacturer="NXP SEMICONDUCTORS", Author="CERN DEM JLC", Bonding=No, ComponentHeight=1.1mm, Component Type=Standard, CreateDate=19.11.2014, Device=74HC4066PW, HelpURL=\\cern.ch\dfs\Applications\Altium\Datasheets\74HC4066PW.pdf, LatestRevisionDate=19.11.2014, Manufacturer Part Number=74HC4066PW, Mounted=Yes, PackageDescription="SOP, 14-Leads, Body 4.4x5mm (max), Pitch 0.65mm, IPC Medium Density", Part Description="Quad Single-Pole Single-Throw Analog Switch", Part Number=74HC4066PW, Pin Count=14, PressFit=No, Sense=No, SMD=Yes, Socket=No
IC4: "3.3V 300mA, Ultra-Low Quiescent Current, IQ 12uA, Ultra-Low Noise, LDO Voltage Regulator", Case=SOT23-5, Manufacturer="ON SEMICONDUCTOR", Author="CERN DEM JLC", Bonding=No, ComponentHeight=1.1mm, Component Type=Standard, CreateDate=16.02.2017, Device=NCP703SN33T1G, HelpURL=\\cern.ch\dfs\Applications\Altium\Datasheets\NCP703SN33T1G.pdf, LatestRevisionDate=16.02.2017, Manufacturer Part Number=NCP703SN33T1G, Mounted=Yes, PackageDescription="SOT, 0.95mm Pitch; 5 Pin, 1.50mm W X 3.00mm L X 1.10mm H Body, IPC Medium Density", Part Description="3.3V 300mA, Ultra-Low Quiescent Current, IQ 12uA, Ultra-Low Noise, LDO Voltage Regulator", Part Number=NCP703SN33T1G, Pin Count=5, PressFit=No, Sense=No, SMD=Yes, Socket=No
J1 J2: library part 3M_N2530-6002RB, "Connector 30 Male", Manufacturer=3M, Manufacturer Part Number=N2530-6002RB, Author="CERN DEM JLC", ComponentHeight=10.03mm, Component Type=Standard, CreateDate=11.02.2009, Family="Header 30", HelpURL=\\cern.ch\dfs\Applications\Altium\Datasheets\3M_N2530-6002RB.pdf, LatestRevisionDate=11.08.2009, Mounted=Yes, Part Description="30 Contacts - Straight .100'' x .100'' Low Profile Four-Wall Header, 2500 Series", Part Number=3M_N2530-6002RB, Pin Count=30, PressFit=No, Sense=No, SMD=No, Socket=No, Status=None
J26: library part AMPHENOL_10052825-101LF, "72 Contacts Header, 6 Columns, 4 Pairs per Column", Manufacturer=AMPHENOL, Manufacturer Part Number=10052825-101LF, Author="CERN DEM MR", ClassName=Overlapping, ComponentHeight=15.35mm, ComponentLink1Description=Application, ComponentLink1URL=\\cern.ch\dfs\Applications\Altium\Datasheets\AMPHENOL_10052825-101LF_Application.pdf, Component Type=Standard, CreateDate=19/02/2018, Family="AirMax VS", HelpURL=\\cern.ch\dfs\Applications\Altium\Datasheets\AMPHENOL_10052825-101LF.pdf, LatestRevisionDate=19/02/2018, Mounted=Yes, Part Description="72 Contacts, 2mm Pitch, 6 Columns, 4 Pairs per Column, 4 Walls, Right Angle Header", Part Number=AMPHENOL_10052825-101LF, Pin Count=72, PressFit=Yes, Sense=No, SMD=No, Socket=No, Status=None
J34: library part AMPHENOL_10052838-101LF, "96 Contacts Header, 8 Columns, 4 Pairs per Column", Manufacturer=AMPHENOL, Manufacturer Part Number=10052838-101LF, Author="CERN DEM MR", ClassName=Overlapping, ComponentHeight=15.35mm, ComponentLink1Description=Application, ComponentLink1URL=\\cern.ch\dfs\Applications\Altium\Datasheets\AMPHENOL_10052838-101LF_Application.pdf, Component Type=Standard, CreateDate=19/02/2018, Family="AirMax VS", HelpURL=\\cern.ch\dfs\Applications\Altium\Datasheets\AMPHENOL_10052838-101LF.pdf, LatestRevisionDate=19/02/2018, Mounted=Yes, Part Description="96 Contacts, 2mm Pitch, 8 Columns, 4 Pairs per Column, 4 Walls, Right Angle Header", Part Number=AMPHENOL_10052838-101LF, Pin Count=96, PressFit=Yes, Sense=No, SMD=No, Socket=No, Status=None
R1: library part R0603_220R_1%_0.1W_100PPM, "Resistor - 1%", Case=0603, Manufacturer=GENERIC, Manufacturer1 ComponentHeight=0.55mm, Manufacturer1 Example="NIC COMPONENT", Manufacturer1 Part Number=NRC06F2200TRF, Power=0.1W, Tolerance=±1%, Author="CERN DEM JLC", Component Type=Standard, CreateDate=03.12.2007, HelpURL=\\cern.ch\dfs\Applications\Altium\Datasheets\R0603_NIC_NRC.pdf, LatestRevisionDate=13.03.2008, Manufacturer Part Number=R0603_220R_1%_0.1W_100PPM, Mounted=Yes, Part Description="General Purpose Thick Film Chip Resistor", Part Number=R0603_220R_1%_0.1W_100PPM, Pin Count=2, PressFit=No, Sense=No, SMD=Yes, Socket=No, Status=Preferred, TC=±100ppm/°C
R2 R45 R73: library part R0402_0R_JUMPER, "Resistor", Case=0402, Manufacturer=GENERIC, Manufacturer1 ComponentHeight=0.4mm, Manufacturer1 Example="YAGEO PHYCOMP", Manufacturer1 Part Number=232270591001L, Author="CERN DEM JLC", Component Type=Standard, CreateDate=03.12.2007, HelpURL=\\cern.ch\dfs\Applications\Altium\Datasheets\R0402_Phycomp_RC0402.pdf, LatestRevisionDate=17.10.2012, Manufacturer Part Number=R0402_0R_JUMPER, Mounted=Yes, Part Description="1A (0.05R Max DC Resistance) Zero Ohm Jumper", Part Number=R0402_0R_JUMPER, Pin Count=2, PressFit=No, Sense=No, SMD=Yes, Socket=No, Status="Not Recommended"
TR3: library part XFMR_MINI-CIRCUITS_TCM2-43X+, "50 OHMS 10 to 4000 MHz RF Transformer", Manufacturer=MINI-CIRCUITS, Manufacturer Part Number=TCM2-43X+, Power=0.4W, Author="CERN DEM BC", ComponentHeight=4.06mm, Component Type=Standard, CreateDate=2016-02-12, HelpURL=\\cern.ch\dfs\Applications\Altium\Datasheets\XFMR_MINI-CIRCUITS_TCM2-43X+.pdf, LatestRevisionDate=2016-02-12, Mounted=Yes, Part Description="50 Ohms 10 to 4000MHz RF Transformer", Part Number=XFMR_MINI-CIRCUITS_TCM2-43X+, Pin Count=6, Sense=No, SMD=Yes, Socket=No, Status=None

## Free pads (board coordinates)
  round 3.5 on Mech9: 1(88.925,69.06) 1(313.94,69.06)
  round 2 on Mech9: 1(98.925,69.06) 1(303.94,69.06) 1(303.94,188.86)
  round 0.8 on Mech9: 1(100.825,178.95) 1(102.075,178.95) 1(103.325,178.95) 1(104.575,178.95) 1(105.825,178.95) 1(155.825,78.96) 1(155.825,178.96) 1(157.075,78.96) 1(157.075,178.96) 1(158.325,78.96) 1(158.325,178.96) 1(159.575,78.96) 1(159.575,178.96) 1(160.825,78.96) 1(160.825,178.96) 1(210.825,78.96) 1(210.825,178.96) 1(212.075,78.96) 1(212.075,178.96) 1(213.325,78.96) 1(213.325,178.96) 1(214.575,78.96) 1(214.575,178.96) 1(215.825,78.96) 1(215.825,178.96) 1(265.825,78.96) 1(265.825,178.96) 1(267.075,78.96) 1(267.075,178.96) 1(268.325,78.96) 1(268.325,178.96) 1(269.575,78.96) 1(269.575,178.96) 1(270.825,78.96) 1(270.825,178.96)
  round 6 hole 3.2: 2(254.965,83) 3(254.965,175)

## Nets (pads, with @x,y where several pads share a name; then routed paths per layer and width w, separated by ;. In a path a pad name is that pad's centre, name@x,y a point inside that pad or via, vN(x,y) a via of type N, cw(c..) or ccw(c..) an arc to the next point about the centre after c; other vN are vias at no path point)
CK_MMCX_IN_N: C195.1 J26.F4 R45.2 TR3.4
CK_MMCX_IN_P: C191.2 J26.E4 R73.2 TR3.6
GND: C1.1 C2.1 C191.1 C195.2 IC1.7 IC4.2 J1.1 J1.4 J1.7 J1.10 J1.13 J1.16 J1.19 J1.22 J1.25 J2.1 J2.4 J2.7 J2.10 J2.13 J2.16 J2.19 J2.22 J2.25 J26.A2 J26.A4 J26.A6 J26.C1 J26.C5 J26.D2 J26.D4 J26.D6 J26.E2 J26.F1 J26.F5 J26.G2 J26.G4 J26.G6 J26.I1 J26.I5 J26.J2 J26.J4 J26.J6 J26.L1 J26.L5 J34.A2 J34.A4 J34.A6 J34.A8 J34.C1 J34.C3 J34.C5 J34.C7 J34.D2 J34.D4 J34.D6 J34.D8 J34.F1 J34.F3 J34.F5 J34.F7 J34.G2 J34.G4 J34.G6 J34.G8 J34.I1 J34.I3 J34.I5 J34.I7 J34.J2 J34.J4 J34.J6 J34.J8 J34.L1 J34.L3 J34.L5 J34.L7 R1.1 R45.1 TR3.1 TR3.2 TR3.5
I2C0_SCL: IC1.2 IC1.3 J1.27
I2C0_SDA: IC1.9 IC1.10 J1.26
I2C1_SCL: J2.27
I2C1_SDA: J2.26
I2C_SCL: IC1.1 IC1.4 J26.B2
I2C_SDA: IC1.8 IC1.11 J26.C2
LVDS0_N: J1.3 J26.B5 | length 66.2
  Top Layer w0.1: 272.39,133.248 272.653,132.985 286.706,132.985 295.022,124.67 295.022,115.061 302.905,107.178 302.905,107.147 303.047,107.005 303.047,101.923 303.155,101.816 303.155,101.391 303.413,101.134 303.837,101.134 308.909,96.061 309.148,96.061 309.148,94.14 309.078,94.14 308.674,93.736 308.674,92.26 J26.B5
LVDS0_P: J1.2 J26.A5 | length 66.6
  Top Layer w0.1: 272.602,133.461 272.777,133.285 286.831,133.285 295.322,124.794 295.322,115.185 303.205,107.302 303.205,107.272 303.347,107.129 303.347,102.047 303.455,101.94 303.455,101.516 303.537,101.434 304.2,101.434 309.448,96.185 309.448,94.14 309.65,94.14 310.054,93.736 310.054,92.24 J26.A5
LVDS1_N: J1.6 J26.C6 | length 60.3
  Top Layer w0.1: 272.301,130.264 272.288,130.277 272.644,130.632 286.461,130.632 293.578,123.515 293.578,115.012 301.984,106.606 301.984,106.582 301.993,106.573 301.993,100.521 307.114,95.4 307.114,94 J26.C6
LVDS1_P: J1.5 J26.B6 | length 61.5
  Top Layer w0.1: 272.089,130.052 271.988,130.152 271.988,130.401 272.519,130.932 286.585,130.932 293.878,123.64 293.878,115.136 302.284,106.731 302.284,100.654 307.414,95.524 307.414,94 J26.B6
LVDS2_N: J1.9 J26.E5 | length 32.2
  Top Layer w0.1: 290.792,117.081 301.503,106.37 301.503,98.573 305.121,94.954 305.121,94.421 304.445,93.744 304.454,93.736 304.454,93.164 303.664,92.374 J26.E5
LVDS2_P: J1.8 J26.D5 | length 32.4
  Top Layer w0.1: 291.004,117.293 301.803,106.495 301.803,98.697 305.421,95.078 305.421,94.296 305.333,94.209 305.402,94.14 305.45,94.14 305.854,93.736 305.854,93.164 305.064,92.374 J26.D5
LVDS3_N: J1.12 J26.F6 | length 23.8
  Top Layer w0.1: 293.864,113.29 300.834,106.32 300.834,97.08 302.914,95 302.914,94 J26.F6
LVDS3_P: J1.11 J26.E6 | length 24.1
  Top Layer w0.1: 294.076,113.502 301.134,106.444 301.134,97.204 303.214,95.124 303.214,94 J26.E6
LVDS4_N: J1.15 J26.H5 | length 24.9
  Top Layer w0.1: 293.395,112.573 299.801,106.167 299.801,96.744 300.484,96.061 300.484,94.58 300.614,94.45 300.614,94.076 300.274,93.736 300.274,93.164 300.614,92.824 300.614,92.6 J26.H5
LVDS4_P: J1.14 J26.G5 | length 25.1
  Top Layer w0.1: 293.608,112.785 300.101,106.291 300.101,96.868 300.784,96.185 300.784,94.704 300.914,94.574 300.914,94.45 301.224,94.14 301.25,94.14 301.654,93.736 301.654,93.164 301.098,92.608 300.914,92.608 300.914,91.5 J26.G5
LVDS5_N: J1.18 J26.I6 | length 22.5
  Top Layer w0.1: 291.264,111 294,111 298.714,106.286 298.714,94 J26.I6
LVDS5_P: J1.17 J26.H6 | length 23
  Top Layer w0.1: 291.264,111.3 294.124,111.3 299.014,106.411 299.014,94 J26.H6
LVDS6_N: J1.21 J26.K5 | length 19.3
  Top Layer w0.1: 293.37,108.458 296.647,105.181 296.647,94.309 296.074,93.736 296.074,93.164 296.393,92.845 296.393,92.68 296.243,92.68 295.814,92.25 295.814,92 J26.K5
LVDS6_P: J1.20 J26.J5 | length 19.7
  Top Layer w0.1: 293.608,108.645 296.947,105.306 296.947,94.243 297.454,93.736 297.454,93.164 296.669,92.38 296.368,92.38 296.114,92.126 296.114,92 J26.J5
LVDS7_N: J1.24 J26.L6 | length 14.2
  Top Layer w0.1: 292.864,106.731 294.514,105.081 294.514,94 J26.L6
LVDS7_P: J1.23 J26.K6 | length 14.4
  Top Layer w0.1: 293.076,106.943 294.814,105.205 294.814,94 J26.K6
LVDS8_N: J2.3 J34.K1
LVDS8_P: J2.2 J34.J1
LVDS9_N: J2.6 J34.H1
LVDS9_P: J2.5 J34.G1
LVDS10_N: J2.9 J34.E1
LVDS10_P: J2.8 J34.D1
LVDS11_N: J2.12 J34.B1
LVDS11_P: J2.11 J34.A1
LVDS12_N: J2.15 J26.B3
LVDS12_P: J2.14 J26.A3
LVDS13_N: J2.18 J26.E3
LVDS13_P: J2.17 J26.D3
LVDS14_N: J2.21 J26.I4
LVDS14_P: J2.20 J26.H4
LVDS15_N: J2.24 J26.L4
LVDS15_P: J2.23 J26.K4
NetC190_1: C190.1
NetC190_2: C190.2 R73.1 TR3.3
P3V3MP: C2.2 IC4.5 J1.30 J2.30 R2.1
P12V0: J1.28 J1.29 J2.28 J2.29 J26.A1 J26.D1 J26.E1 J26.G1 J26.H1 J26.J1 J26.K1
reserved: J26.F2
RST#: J26.H2
SLOT_EN#: IC1.5 IC1.6 IC1.12 IC1.13 J26.K2 R1.2
STANDBY: C1.2 IC4.1 IC4.3 J26.B1
VCC: IC1.14 R2.2
WAKE_OUT#: J26.I2
pads on no net: IC4.4 J26.B4 J26.C3 J26.C4 J26.F3 J26.G3 J26.H3 J26.I3 J26.J3 J26.K3 J26.L2 J26.L3 J34.A3 J34.A5 J34.A7 J34.B2 J34.B3 J34.B4 J34.B5 J34.B6 J34.B7 J34.B8 J34.C2 J34.C4 J34.C6 J34.C8 J34.D3 J34.D5 J34.D7 J34.E2 J34.E3 J34.E4 J34.E5 J34.E6 J34.E7 J34.E8 J34.F2 J34.F4 J34.F6 J34.F8 J34.G3 J34.G5 J34.G7 J34.H2 J34.H3 J34.H4 J34.H5 J34.H6 J34.H7 J34.H8 J34.I2 J34.I4 J34.I6 J34.I8 J34.J3 J34.J5 J34.J7 J34.K2 J34.K3 J34.K4 J34.K5 J34.K6 J34.K7 J34.K8 J34.L2 J34.L4 J34.L6 J34.L8
copper on no net: | length 0.7
  L8 w0.08: 304.162,96.937 304.175,96.95 304.175,97.2 ; 304.355,97.275 304.355,96.95 304.425,96.88

## Polygon pours and split planes (outlines as drawn)
no net on Mechanical 9 "Panelisation" (hatched 45Degree grid 2.54 track 0.1): 73.925,76.56 329,76.56 329,61.56 73.925,61.56
no net on Mechanical 9 "Panelisation" (hatched 45Degree grid 2.54 track 0.1): 73.926,181.36 328.94,181.36 328.94,196.36 73.926,196.36
no net on Top Layer "esd1" (solid, remove dead copper, pour order 189): 308.858,79.95 308.875,79.95 310.375,81.45 270.925,81.45 270.925,79.95
GND on L2GND (split plane): 310.861,176.742 310.861,81.158 309.156,79.452 251.553,79.452 251.553,178.448 309.156,178.448
no net on L4PWR (split plane): 305.798,86.909 303.226,84.337 293.135,84.337 293.089,84.33 293.047,84.313 293.01,84.285 292.75,84.025 292.722,83.988 292.705,83.946 292.698,83.9 292.698,79.452 251.553,79.452 251.553,175.498 305.798,175.498
no net on L4PWR (split plane): 310.861,176.742 310.861,81.158 309.156,79.452 293.052,79.452 293.052,83.827 293.208,83.983 303.299,83.983 303.344,83.99 303.387,84.007 303.424,84.035 306.1,86.711 306.128,86.748 306.145,86.791 306.152,86.836 306.152,175.675 306.145,175.721 306.128,175.763 306.1,175.8 306.063,175.828 306.021,175.845 305.975,175.852 251.553,175.852 251.553,178.448 309.156,178.448
no net on L6PWR (split plane): 305.823,86.909 303.251,84.337 293.16,84.337 293.114,84.33 293.072,84.313 293.035,84.285 292.775,84.025 292.747,83.988 292.73,83.946 292.723,83.9 292.723,79.452 251.553,79.452 251.553,175.498 305.823,175.498
no net on L6PWR (split plane): 310.861,176.742 310.861,81.158 309.156,79.452 293.077,79.452 293.077,83.827 293.233,83.983 303.324,83.983 303.369,83.99 303.412,84.007 303.449,84.035 306.125,86.711 306.153,86.748 306.17,86.791 306.177,86.836 306.177,175.675 306.17,175.721 306.153,175.763 306.125,175.8 306.088,175.828 306.046,175.845 306,175.852 251.553,175.852 251.553,178.448 309.156,178.448
GND on L7GND (split plane): 310.861,176.742 310.861,81.158 309.156,79.452 251.553,79.452 251.553,178.448 309.156,178.448
no net on L9PWR (split plane): 305.823,86.909 303.251,84.337 293.16,84.337 293.114,84.33 293.072,84.313 293.035,84.285 292.775,84.025 292.747,83.988 292.73,83.946 292.723,83.9 292.723,79.452 251.553,79.452 251.553,175.498 305.823,175.498
no net on L9PWR (split plane): 310.861,176.742 310.861,81.158 309.156,79.452 293.077,79.452 293.077,83.827 293.233,83.983 303.324,83.983 303.369,83.99 303.412,84.007 303.449,84.035 306.125,86.711 306.153,86.748 306.17,86.791 306.177,86.836 306.177,175.675 306.17,175.721 306.153,175.763 306.125,175.8 306.088,175.828 306.046,175.845 306,175.852 251.553,175.852 251.553,178.448 309.156,178.448
GND on L11GND (split plane): 310.861,176.742 310.861,81.158 309.156,79.452 251.553,79.452 251.553,178.448 309.156,178.448

## Keep-outs
Keep-Out Layer:
  lines w0.2: 91.325,78.95 309.364,78.95 311.363,80.95 311.364,176.95 309.364,178.95 91.325,178.95

## Other copper
Top Layer:
  text ".Layer_Name" at 161.93,46.565 h1.91
  text "1" at 172.725,32.595 h2.54
L3:
  text "Signal" at 162.15,46.525 h1.9
  text "3" at 182.885,32.595 h2.54
L5:
  text "Signal" at 162.15,46.525 h1.9
  text "5" at 193.045,32.595 h2.54
L8:
  text "Signal" at 200.15,46.525 h1.9
  text "8" at 208.275,32.595 h2.54
L10:
  text "Signal" at 200.03,46.565 h1.9
  text "10" at 217.35,32.625 h2.54
Bottom Layer:
  text ".Layer_Name" at 200.03,46.565 h1.91
  text "12" at 227.55,32.525 h2.54
L2GND (plane layer: these items are gaps in the copper):
  rectangle: 180.98,31.325 232.05,36.425
  rectangle: 170.82,31.325 175.9,36.405
  text "GND" at 287.655,82.55 h2.54
  text "Ground Plane" at 199.95,46.525 h1.9
  text "2" at 177.805,32.595 h2.54
L4PWR (plane layer: these items are gaps in the copper):
  rectangle: 191.15,31.325 231.75,36.405
  rectangle: 170.82,31.325 185.95,36.405
  lines w0.35: 190.3,164.375 190.3,178.95 ; 190.325,164.45 190.325,151.525 191.575,150.275 197.7,150.275 198.75,151.325 198.75,174.175 200.175,175.6 ; 200.25,175.675 305.975,175.675 305.975,86.836 303.299,84.16 293.135,84.16 292.875,83.9 292.875,79.025
  lines w0.5: 176.799,178.374 176.799,172.001 176.799,169.151 177.35,168.6 188.48,168.6 188.496,168.585 ; 188.615,168.6 188.65,168.6 190,169.95 190,178.935 ; 266.125,168.55 266.125,168.55
  text "V12P0" at 187.07,176 h2.54
  text "VADJ" at 287.655,82.55 h2.54
  text "Power Plane" at 200.03,46.565 h1.9
  text "4" at 187.965,32.595 h2.54
L7GND (plane layer: these items are gaps in the copper):
  rectangle: 206.45,31.345 231.82,36.425
  rectangle: 170.82,31.325 201.31,36.405
  text "GND" at 281.305,82.55 h2.54
  text "Ground Plane" at 162.05,46.525 h1.9
  text "7" at 203.235,32.595 h2.54
L11GND (plane layer: these items are gaps in the copper):
  rectangle: 170.82,31.325 221.65,36.405
  rectangle: 226.75,31.345 231.82,36.425
  text "GND" at 281.305,82.55 h2.54
  text "Ground Plane" at 162.25,46.325 h1.9
  text "11" at 222.45,32.425 h2.54
L6PWR (plane layer: these items are gaps in the copper):
  rectangle: 170.85,31.325 196.15,36.405
  rectangle: 201.45,31.345 231.85,36.425
  lines w0.35: 190.325,164.375 190.325,178.95 ; 190.35,164.45 190.35,151.525 191.6,150.275 197.725,150.275 198.775,151.325 198.775,174.175 200.2,175.6 ; 200.275,175.675 306,175.675 306,86.836 303.324,84.16 293.16,84.16 292.9,83.9 292.9,79.025
  text "Power Plane" at 199.95,46.525 h1.9
  text "6" at 198.155,32.595 h2.54
L9PWR (plane layer: these items are gaps in the copper):
  rectangle: 216.65,31.345 231.82,36.425
  rectangle: 170.82,31.325 211.47,36.405
  lines w0.35: 190.325,164.375 190.325,178.95 ; 190.35,164.45 190.35,151.525 191.6,150.275 197.725,150.275 198.775,151.325 198.775,174.175 200.2,175.6 ; 200.275,175.675 306,175.675 306,86.836 303.324,84.16 293.16,84.16 292.9,83.9 292.9,79.025
  text "V2P5" at 281.305,82.55 h2.54
  text "Power Plane" at 162.15,46.225 h1.9
  text "9" at 213.395,32.595 h2.54

## Silkscreen, mask and mechanical layers (free items; w line width, h text height)
Top Overlay:
  text ".Layer_Name" at 221.93,44.025 h1.91
Bottom Overlay:
  text ".Layer_Name" at 260.03,44.025 h1.91
Top Paste:
  text ".Layer_Name" at 221.93,38.945 h1.91
Bottom Paste:
  text ".Layer_Name" at 260.03,38.945 h1.91
Top Solder:
  rectangle: 91.948,79.553 310.744,81.35
  rectangle: 178.825,83.85 179.325,85.05
  rectangle: 214.525,174.1 242.925,175.25
  rectangle: 241.625,154.925 242.875,175.275
  rectangle: 214.525,154.95 242.85,156.025
  rectangle: 214.45,165.525 215.4,175.225
  rectangle: 214.55,155.05 215.4,164.65
  rectangle: 214.55,133.5 215.4,143.1
  rectangle: 214.45,143.975 215.4,153.675
  rectangle: 214.525,133.4 242.85,134.475
  rectangle: 241.625,133.375 242.875,153.725
  rectangle: 214.525,152.55 242.925,153.7
  region: 297.362,130.705 297.362,127.205 311.325,127.205 311.325,130.705
  text ".Layer_Name" at 161.93,41.485 h1.91
Bottom Solder:
  rectangle: 91.948,79.553 310.744,81.35
  region: 297.362,130.705 297.362,127.205 311.325,127.205 311.325,130.705
  text ".Layer_Name" at 260.03,41.485 h1.91
Mechanical 1:
  the board outline again, w0.1
Mechanical 2:
  lines w0.2: 291.264,160 291.714,160.45 293.864,160.45 ; 291.714,83.45 293.864,83.45 ; 293.864,81.25 293.864,83.45 ; 293.864,87.45 293.864,83.45 ; 293.864,157.25 293.864,160.45 ; 293.864,164.45 293.864,160.45 ; 295.264,83.45 293.864,83.45 ; 295.764,160.45 293.864,160.45
  text "Components" at 303.615,45.415 h1.91
  text ".Component_Count" at 321.395,45.415 h1.91
  text "Pins" at 303.615,42.875 h1.91
  text ".Pad_Count" at 321.395,42.875 h1.91
  text "Vias" at 303.615,40.335 h1.91
  text ".Via_Count" at 321.395,40.335 h1.91
  text "Holes" at 303.615,37.795 h1.91
  text ".Hole_Count" at 321.395,37.795 h1.91
  text "Nets" at 303.615,35.255 h1.91
  text ".Net_Count" at 321.395,35.255 h1.91
Corners:
  lines w0.254: 86.325,178.95 91.325,178.95 91.325,183.95 ; 91.325,73.96 91.325,78.96 ; 175.9,31.325 175.9,36.405 ; 180.98,31.325 180.98,36.405 ; 186.06,31.325 186.06,36.405 ; 196.23,31.325 196.23,36.405 ; 201.31,31.325 201.31,36.405 ; 206.39,31.325 206.39,36.405 ; 216.55,31.325 216.55,36.405 ; 221.63,31.325 221.63,36.405 ; 226.71,31.325 226.71,36.405 ; 311.356,73.95 311.356,78.95 316.356,78.95 ; 311.356,183.95 311.356,178.95 316.356,178.95 ; 211.47,31.325 211.47,36.405 ; 211.47,31.325 191.15,31.325 191.15,36.405 211.47,36.405 ; 211.47,31.325 211.47,36.405 ; 211.47,31.325 231.79,31.325 231.79,36.405 211.47,36.405 ; 170.82,31.325 191.14,31.325 191.14,36.405 170.82,36.405 170.82,31.325
Title Block:
  circle w0.305: c105.415,44.025 r3.81
  lines w0.254: 101.859,42.653 102.875,39.58 ; 103.51,42.763 ccw(c107.955,42.755) 104.223,45.169 ; 104.907,36.532 107.98,41.206 ; 105.415,47.835 113.035,48.47 ; 109.149,44.787 111.765,36.405 ; 112.4,42.755 112.4,47.2 ; 114.94,39.58 156.85,39.58 ; 114.94,42.755 156.85,42.755 ; 114.94,45.93 156.85,45.93 ; 128.91,36.405 128.91,49.105 ; 100.97,36.405 113.67,36.405 113.67,49.105 100.97,49.105 100.97,36.405 ; 114.94,36.405 156.85,36.405 156.85,49.105 114.94,49.105 114.94,36.405
  text "Number" at 116.21,46.565 h1.91
  text "EDA-03828-V1" at 130.18,46.565 h1.91
  text "Drawn By" at 116.21,43.39 h1.91
  text "A.Paixao" at 130.18,43.39 h1.91
  text "CERN" at 102.24,43.136 h2.54
  text "DATE" at 116.21,40.215 h1.91
  text "01/06/2018" at 130.18,40.215 h1.91
  text "MOD." at 116.21,37.04 h1.91
  text "Print Date" at 116.21,33.865 h1.27
  text ".Print_Date" at 131.45,33.865 h1.27
  text ".Print_Time" at 144.15,33.865 h1.27
  text ".Print_Scale" at 116.21,31.325 h1.27
Notvisible:
  circle w0.127: c158.085,173.4 r1.35
  circle w0.127: c158.895,84.5 r1.35
  lines w0.025: 191.432,103.314 208.232,106.314 ; 191.432,106.314 208.232,103.314
  lines w0.05: 91.325,86.55 91.325,78.95 98.925,78.95 ; 293.864,128.95 309.264,128.95
  lines w0.127: 91.325,176.45 251.325,176.45 ; 96.325,176.45 331.787,176.45 ; 96.325,177.95 250.825,177.95 ; 157.13,172.445 158.085,173.4 159.04,172.445 ; 157.94,83.545 158.895,84.5 159.85,83.545 ; 225.325,79.95 225.325,81.45 ; 225.325,176.45 225.325,177.95 ; 265.325,128.95 265.325,178.95 ; 342.925,100.45 342.925,101.95
  lines w0.5: 91.325,78.95 131.325,78.95 131.325,77.5 ; 136.325,77.5 136.325,78 136.325,78.95 138.65,78.95 ; 265.925,77 265.925,78.95 ; 270.925,77 270.925,78.95
  lines w1: 289.715,78.95 289.715,178.95
  lines w1.27: 253.825,78.95 253.825,178.95 ; 284.7,78.4 284.7,158.45 ; 284.7,158.5 284.7,179.137
Mechanical 9:
  region: 156.325,174.517 158.325,174.85 156.325,175.183
  region: 159.575,174.85 161.575,174.517 161.575,175.183
  pour cut-out: 317.697,65.983 301.187,65.983 301.187,72.174 317.697,72.174
  pour cut-out: 85.168,72.138 101.678,72.138 101.678,65.946 85.168,65.946
  pour cut-out: 301.441,191.998 306.521,191.998 306.521,185.807 301.441,185.807
  lines w0.2: 73.925,76.56 328.9,76.56 ; 73.925,181.36 328.94,181.36 ; 92.106,69.065 96.528,69.065 ; 101.377,69.065 301.975,69.065 ; 154.325,174.85 156.325,174.85 ; 158.325,171.45 158.325,177.76 ; 158.325,174.85 159.575,174.85 ; 159.575,174 159.575,178.96 ; 161.575,174.85 166.385,174.85 ; 210.325,173.9 210.325,180.21 ; 216.325,173.9 216.325,180.16 ; 306.707,69.065 311.129,69.065 ; 307.151,187.257 306.751,187.657 ; 307.151,188.057 306.751,187.657 ; 308.925,196.36 73.925,196.36 73.925,61.56 329.025,61.56 ; 318.9,160.394 318.9,179.66 318.9,181.374 312.617,187.657 306.751,187.657 ; 328.94,61.56 328.94,196.36
  lines w0.254: 103.325,78.96 103.325,178.96 ; 103.325,177.85 103.325,180.85 ; 158.325,78.96 158.325,178.96 ; 158.325,77.86 158.325,80.86 ; 158.325,177.86 158.325,180.86 ; 213.325,78.96 213.325,178.96 ; 213.325,77.86 213.325,80.86 ; 213.325,177.86 213.325,180.86 ; 268.325,77.86 268.325,80.86 ; 268.325,78.96 268.325,178.96 ; 268.325,177.86 268.325,180.86 ; 275.928,173.863 271.365,178.426 ; 276.025,173.86 288.235,173.86 ; 311.34,76.26 311.34,78.96 ; 318.35,79.595 318.35,73.456 317.001,72.107 ; 271.365,178.426 271.865,176.926 272.865,177.926 271.365,178.426 ; 317.001,72.107 318.501,72.607 317.501,73.607 317.001,72.107
  text "Area Without Copper and Without Solder Mask - On Both Sides" at 158.025,189.76 h2.54
  text "6.0" at 219.069,175.7 h1.5
  text "1.25" at 162.369,175.65 h1.5
  text "NOT PLATED HOLES" at 276.2,174.5 h2
  text "Ø0.8" at 276.075,172 h2
  text "3x OPTICAL TARGET" at 318.295,153.94 h3 r90
  text "Ø2mm Not Drilled" at 321.152,153.94 h3 r90
  text "Dimensions are rounded to 0.1mm. Gerber data is the reference" at 327.875,86.58 h3 r90
  text "ALL DIMENSIONS ARE IN MILLIMETERS" at 325.017,80.548 h5 r90
  text "Ø3.5 ±0.05" at 317.397,80.23 h2 r90
  text "NOT PLATED HOLE" at 319.302,80.23 h2 r90
  text "Area Without Copper and Without Solder Mask - On Both Sides" at 161.825,71.36 h2.54

## Dimensions
91.5,179 to 251.05,78.95 on Notvisible
303.981,191.998 to 328.94,196.36 on Mechanical 9
306.521,188.903 to 308.925,196.36 on Mechanical 9
73.925,61.56 to 88.925,69.06 on Mechanical 9
73.925,61.56 to 82.325,78.95 on Mechanical 9
91.325,78.95 to 94.895,84.5 on Drill Drawing
317.525,78.95 to 315.34,178.95 on Mechanical 2
91.325,178.95 to 311.356,183.95 on Mechanical 2
91.325,86.182 to 91.325,148.682 on Mechanical 2

## Text inside footprints (layer, text, board x,y; h text height)
J1: Top Overlay "30" at 274.726,99.619 h1.02 r270; Mechanical 14 "30" at 274.726,99.619 h1.02 r270
J2: Top Overlay "30" at 285.013,99.619 h1.02 r270; Mechanical 14 "30" at 285.013,99.619 h1.02 r270
J26: Top Overlay "A" at 309.764,80.25 h1 r90; Top Overlay "B" at 308.364,80.25 h1 r90; Top Overlay "C" at 306.964,80.25 h1 r90; Top Overlay "D" at 305.564,81.25 h1 r90; Top Overlay "E" at 304.164,81.25 h1 r90; Top Overlay "6" at 289.314,93.1 h1 r90; Top Overlay "5" at 289.314,91.1 h1 r90; Top Overlay "4" at 289.314,89.1 h1 r90; Top Overlay "3" at 289.314,87.1 h1 r90; Top Overlay "F" at 302.764,81.25 h1 r90; Top Overlay "G" at 301.364,81.25 h1 r90; Top Overlay "H" at 299.964,81.25 h1 r90; Top Overlay "I" at 298.564,81.5 h1 r90; Top Overlay "J" at 297.164,81.25 h1 r90; Top Overlay "K" at 295.764,81.25 h1 r90; Top Overlay "2" at 289.314,85.1 h1 r90; Top Overlay "L" at 294.364,81.25 h1 r90; Top Overlay "1" at 289.314,83.1 h1 r90; Notvisible "Top Surface of Mother Board" at 323.614,84.075 h0.5 r90; Notvisible "Edge of Daugher Card" at 312.114,85.225 h0.5 r90; Mechanical 14 "A" at 309.764,80.25 h1 r90; Mechanical 14 "B" at 308.364,80.25 h1 r90; Mechanical 14 "C" at 306.964,80.25 h1 r90; Mechanical 14 "D" at 305.564,81.25 h1 r90; Mechanical 14 "E" at 304.164,81.25 h1 r90; Mechanical 14 "6" at 289.314,93.1 h1 r90; Mechanical 14 "5" at 289.314,91.1 h1 r90; Mechanical 14 "4" at 289.314,89.1 h1 r90; Mechanical 14 "3" at 289.314,87.1 h1 r90; Mechanical 14 "F" at 302.764,81.25 h1 r90; Mechanical 14 "G" at 301.364,81.25 h1 r90; Mechanical 14 "H" at 299.964,81.25 h1 r90; Mechanical 14 "I" at 298.564,81.5 h1 r90; Mechanical 14 "J" at 297.164,81.25 h1 r90; Mechanical 14 "K" at 295.764,81.25 h1 r90; Mechanical 14 "1" at 289.314,83.1 h1 r90; Mechanical 14 "2" at 289.314,85.1 h1 r90; Mechanical 14 "L" at 294.364,81.25 h1 r90
J34: Top Overlay "8" at 289.314,174.1 h1 r90; Top Overlay "7" at 289.314,172.1 h1 r90; Top Overlay "6" at 289.314,170.1 h1 r90; Top Overlay "5" at 289.314,168.1 h1 r90; Top Overlay "4" at 289.314,166.1 h1 r90; Top Overlay "3" at 289.314,164.1 h1 r90; Top Overlay "2" at 289.314,162.1 h1 r90; Top Overlay "1" at 289.314,160.1 h1 r90; Notvisible "Edge of Daugher Card" at 312.114,164.225 h0.5 r90; Notvisible "Top Surface of Mother Board" at 323.614,163.075 h0.5 r90; Mechanical 14 "A" at 309.764,157.25 h1 r90; Mechanical 14 "B" at 308.364,157.25 h1 r90; Mechanical 14 "C" at 306.964,157.25 h1 r90; Mechanical 14 "D" at 305.564,158.25 h1 r90; Mechanical 14 "E" at 304.164,158.25 h1 r90; Mechanical 14 "F" at 302.764,158.25 h1 r90; Mechanical 14 "8" at 289.314,174.1 h1 r90; Mechanical 14 "7" at 289.314,172.1 h1 r90; Mechanical 14 "6" at 289.314,170.1 h1 r90; Mechanical 14 "5" at 289.314,168.1 h1 r90; Mechanical 14 "G" at 301.364,158.25 h1 r90; Mechanical 14 "H" at 299.964,158.25 h1 r90; Mechanical 14 "I" at 298.564,158.5 h1 r90; Mechanical 14 "4" at 289.314,166.1 h1 r90; Mechanical 14 "3" at 289.314,164.1 h1 r90; Mechanical 14 "J" at 297.164,158.25 h1 r90; Mechanical 14 "K" at 295.764,158.25 h1 r90; Mechanical 14 "2" at 289.314,162.1 h1 r90; Mechanical 14 "L" at 294.364,158.25 h1 r90; Mechanical 14 "1" at 289.314,160.1 h1 r90; Drill Drawing "PRESS-FIT TECHNOLOGY" at 293.014,127.785 h1; Drill Drawing "Diam. 0.5mm +/-0.05" at 293.014,129.285 h1